# Altium PCB PCB1.PcbDoc
Units mil, origin at the board's own origin, x right, y up, seen from the top; angles counter-clockwise.
Board outline 3150 x 3149.61 mil, 4 copper layers (Top Layer, GND, POWER, Bottom Layer), stack 23.756 mil thick; 108 components, 73 nets, 387 pads, 154 vias.
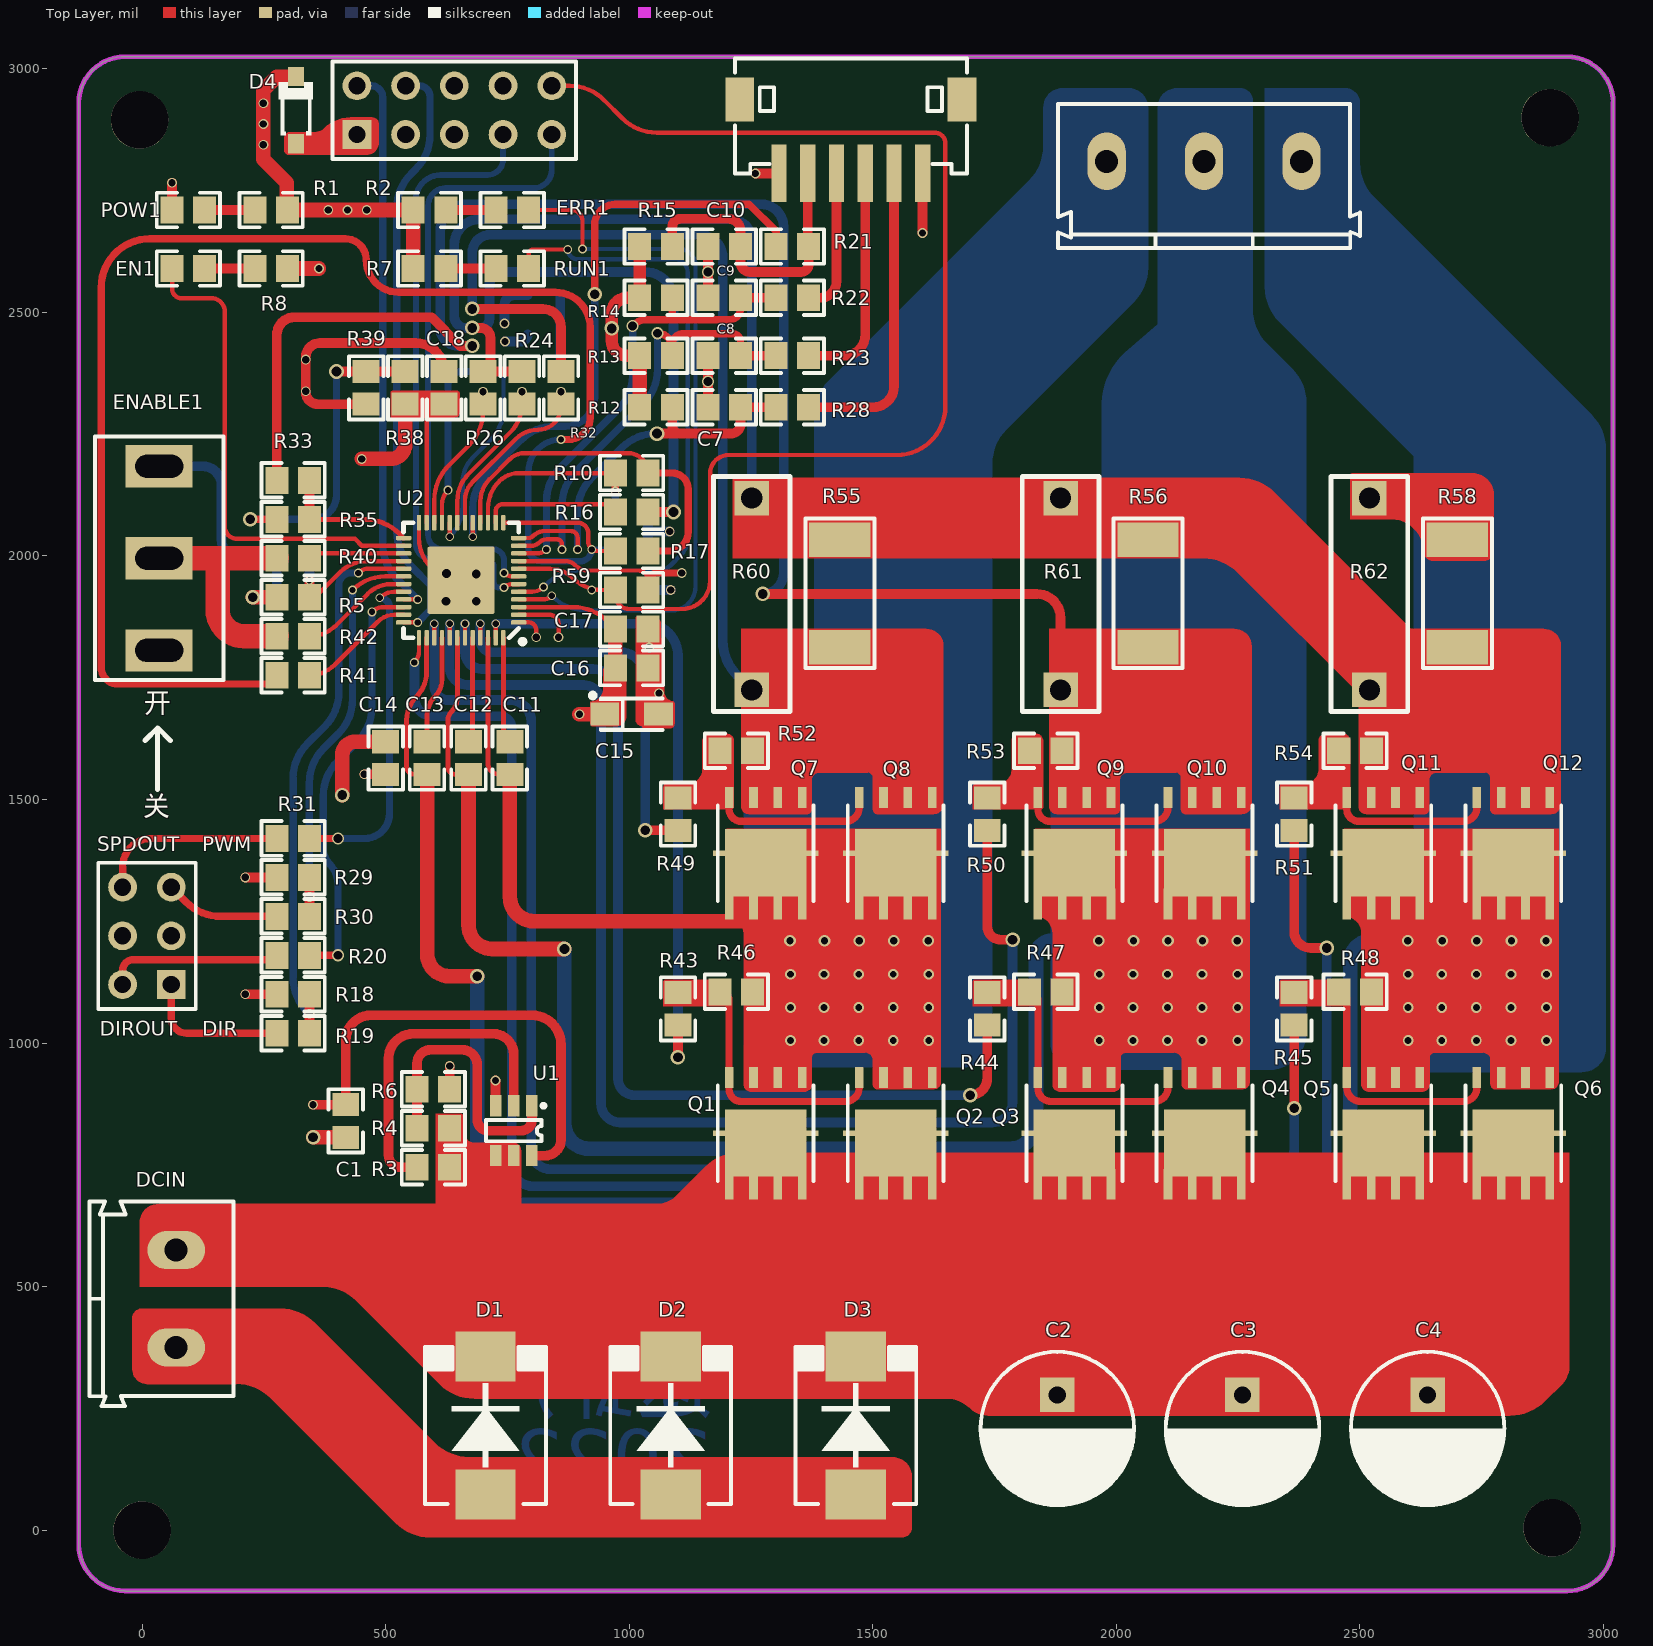
[diagram p0: Top Layer view]
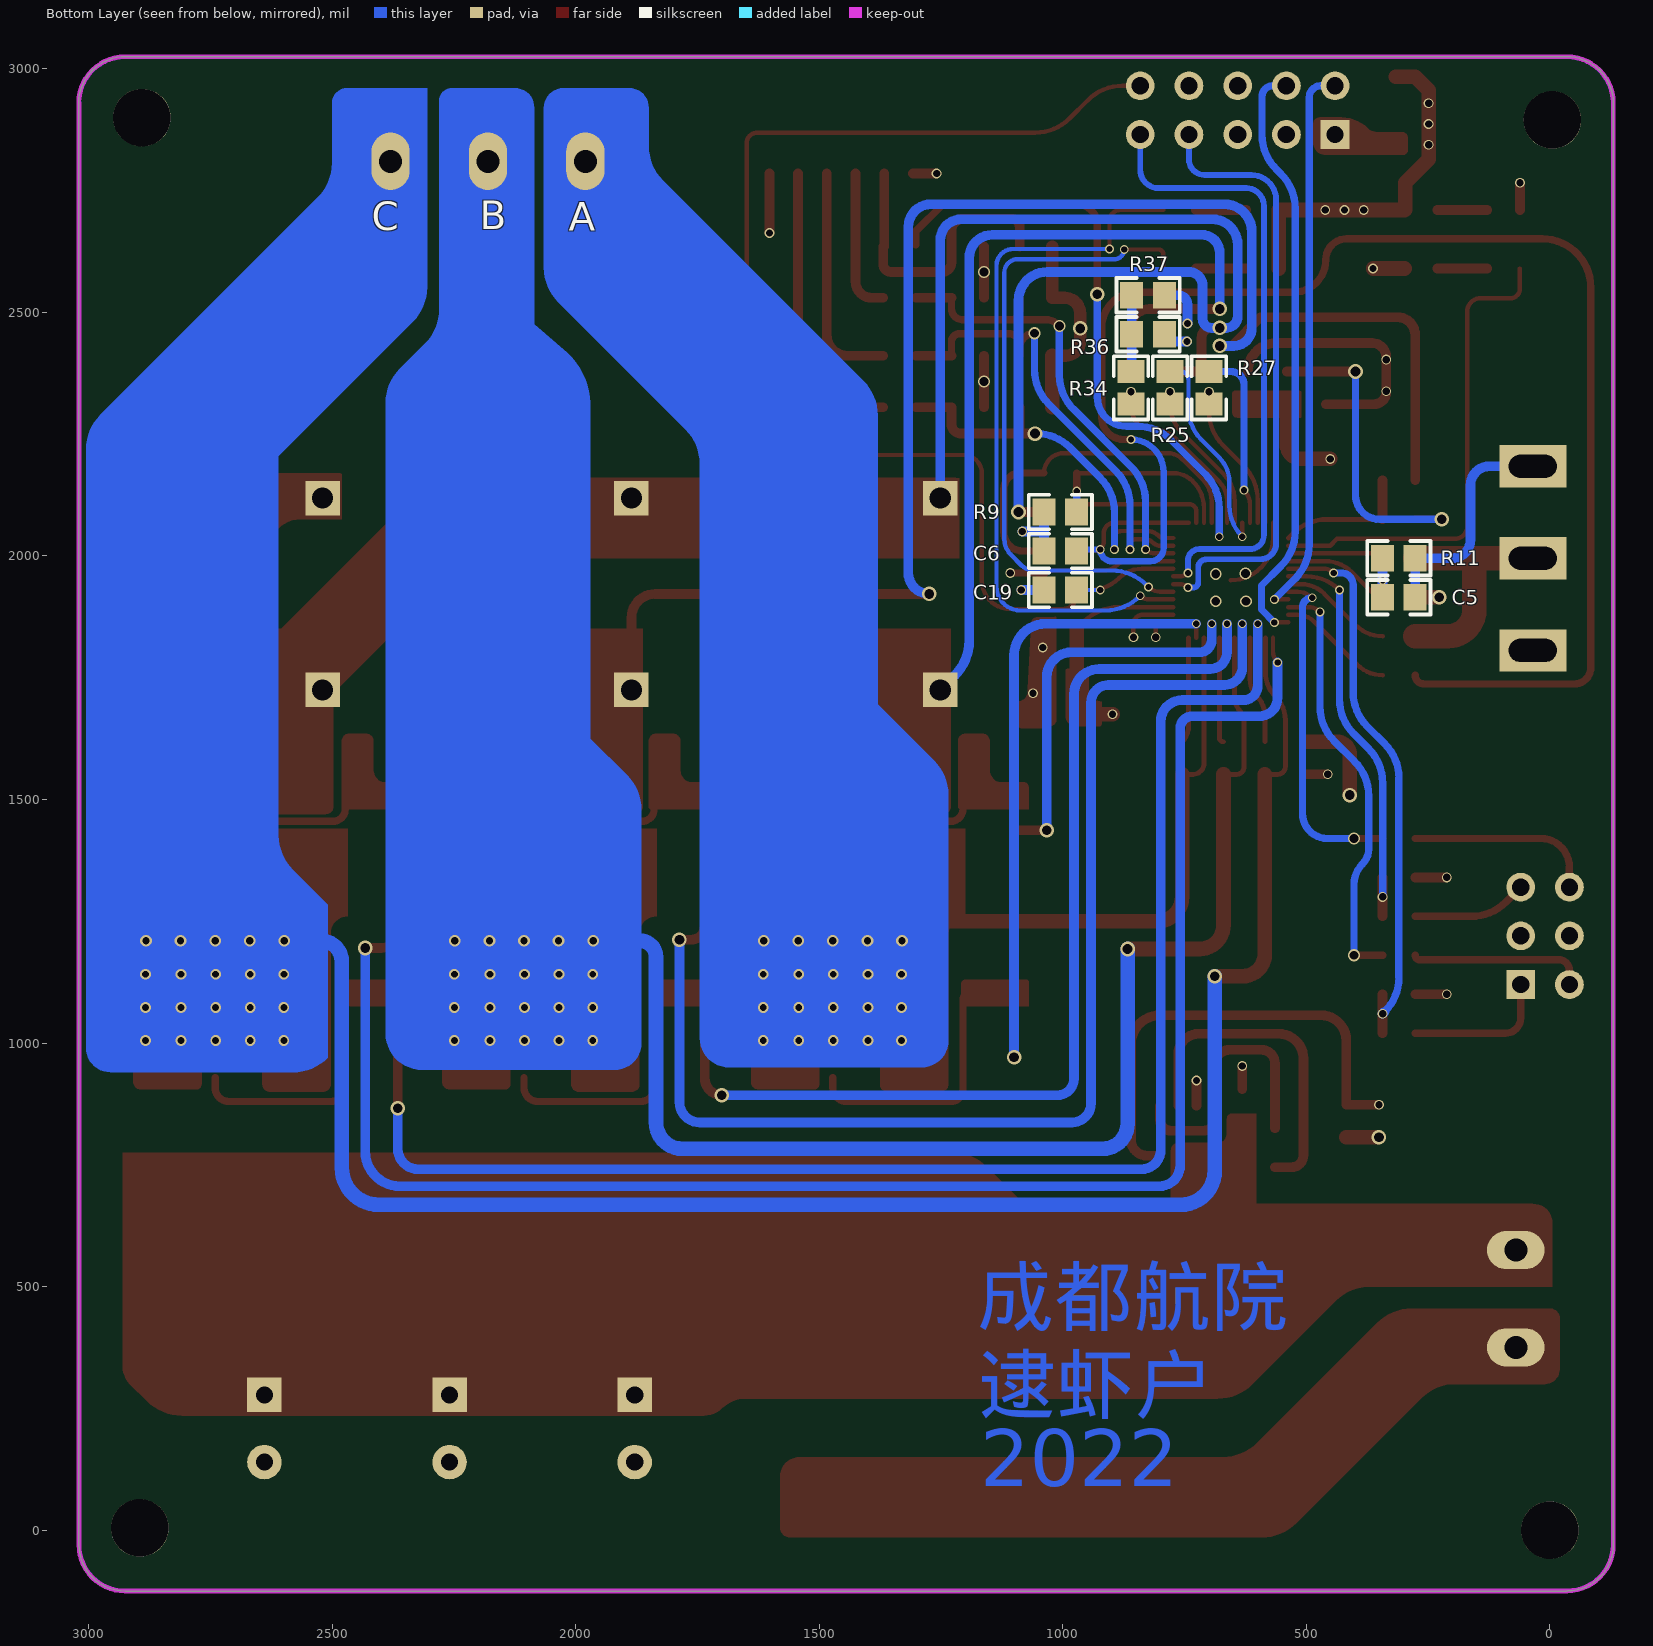
[diagram p1: Bottom Layer view, seen from below]
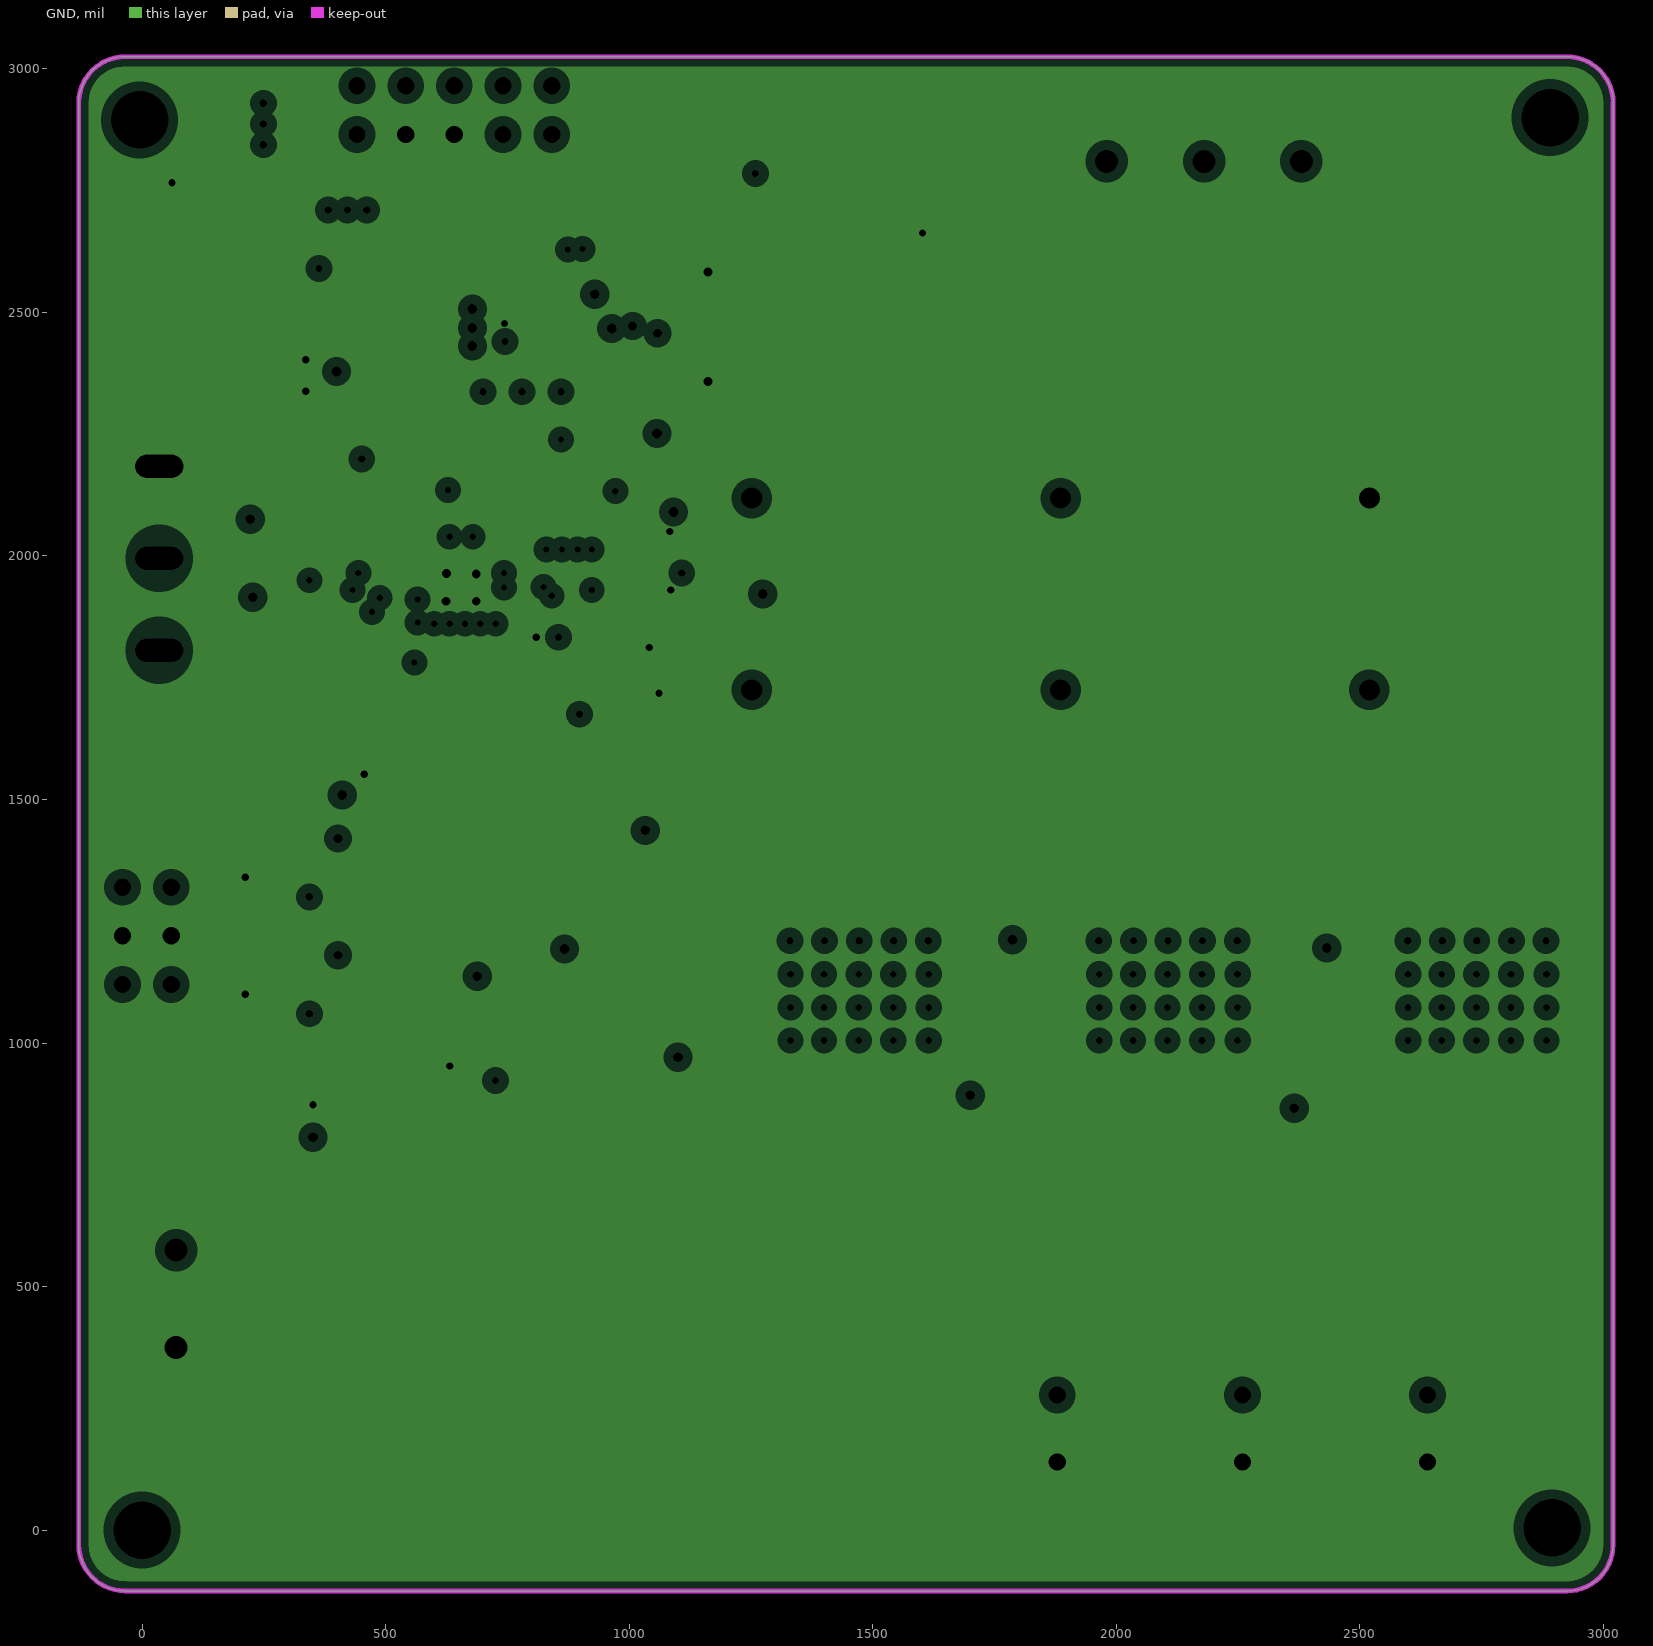
[diagram p2: GND, clearances drawn from the general rule]
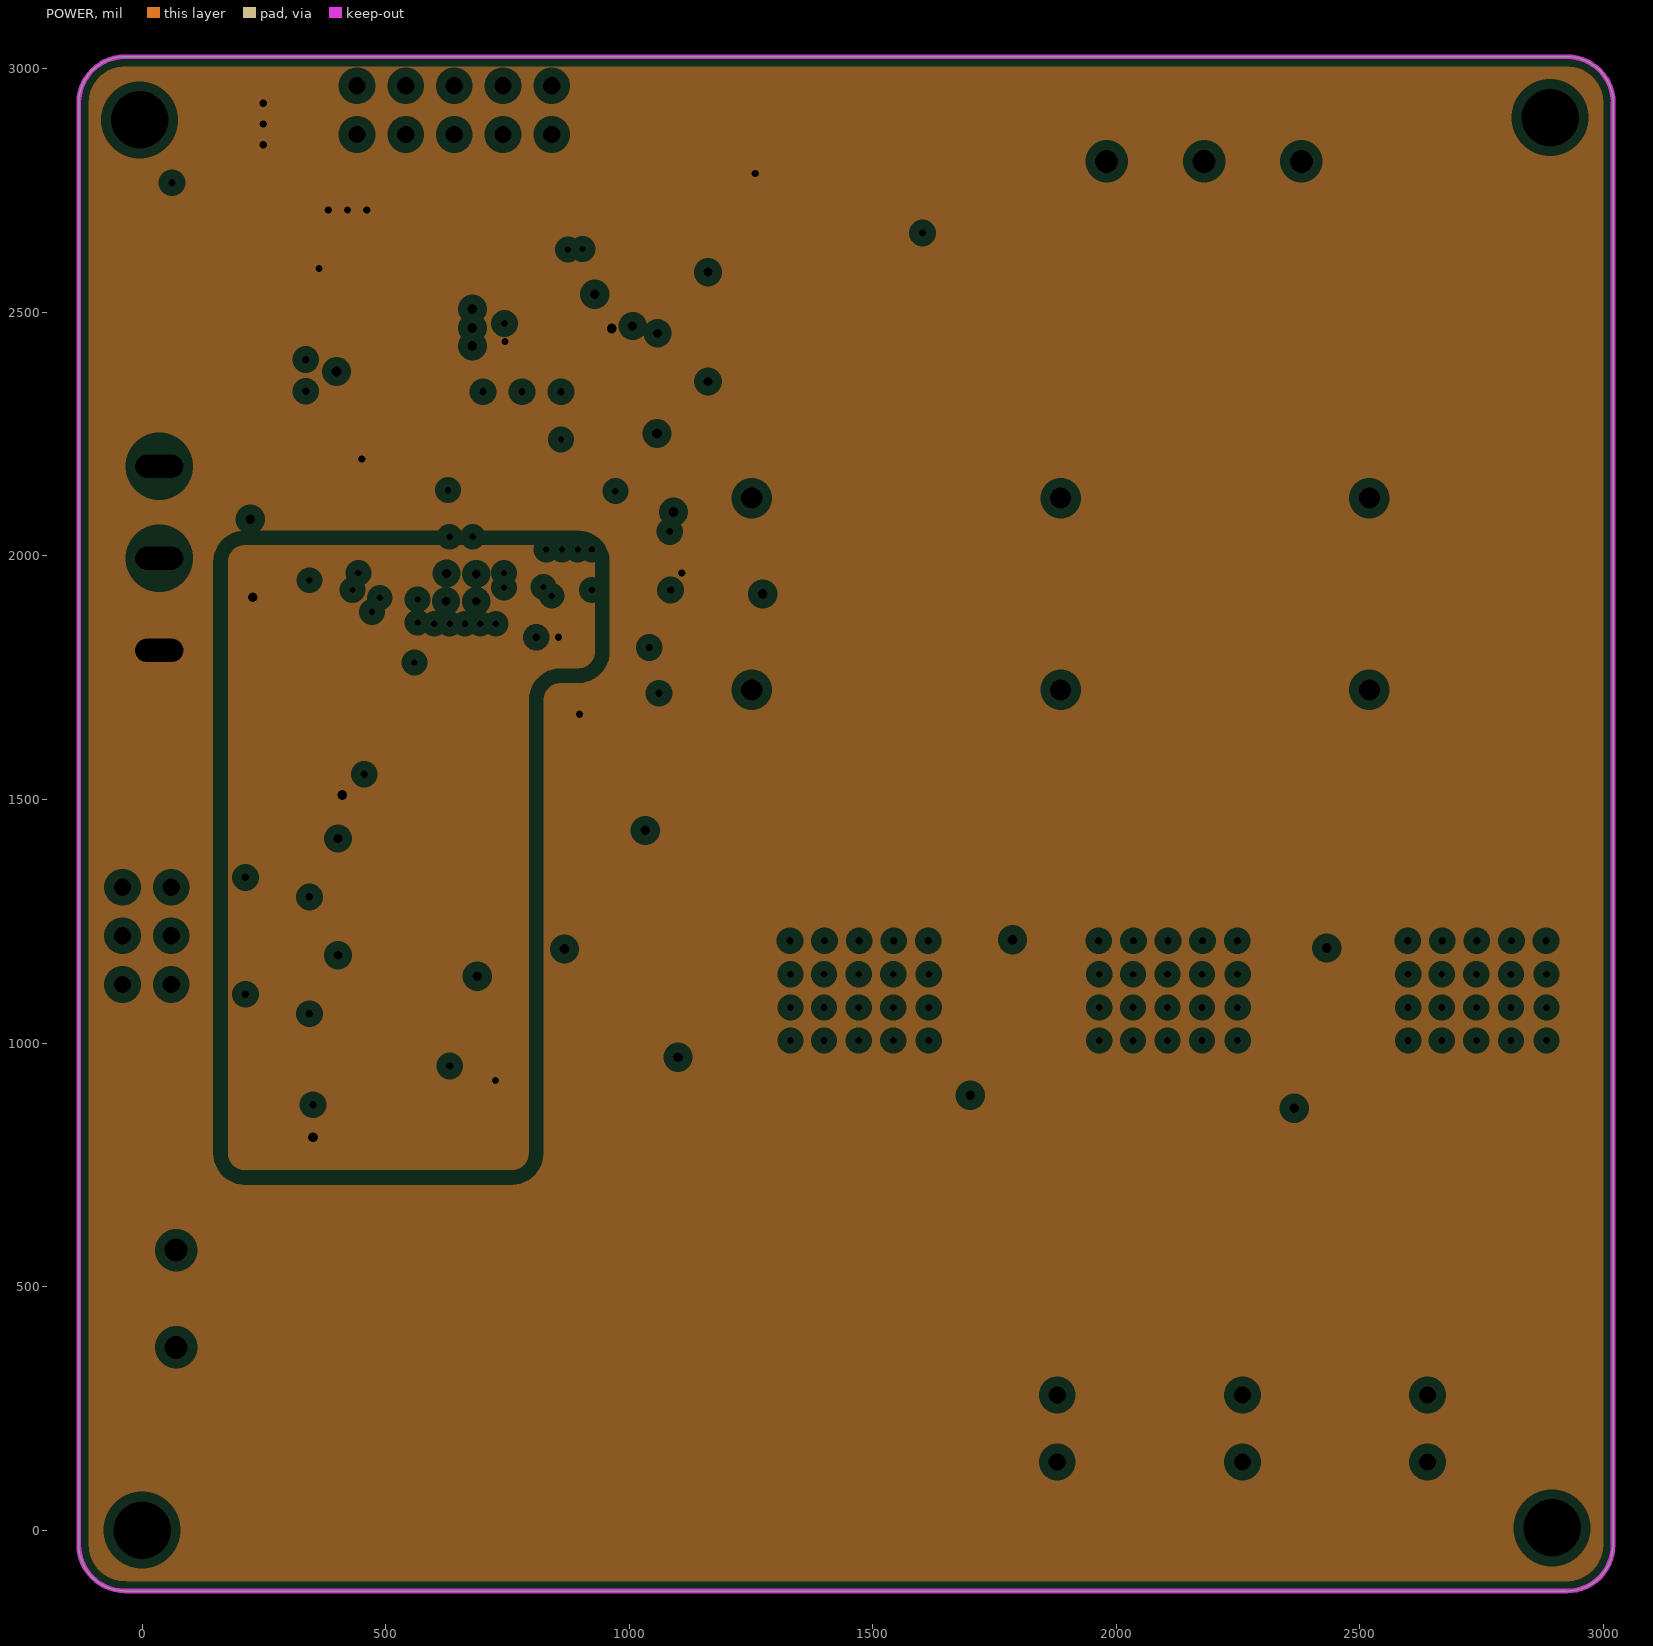
[diagram p3: POWER, clearances drawn from the general rule]
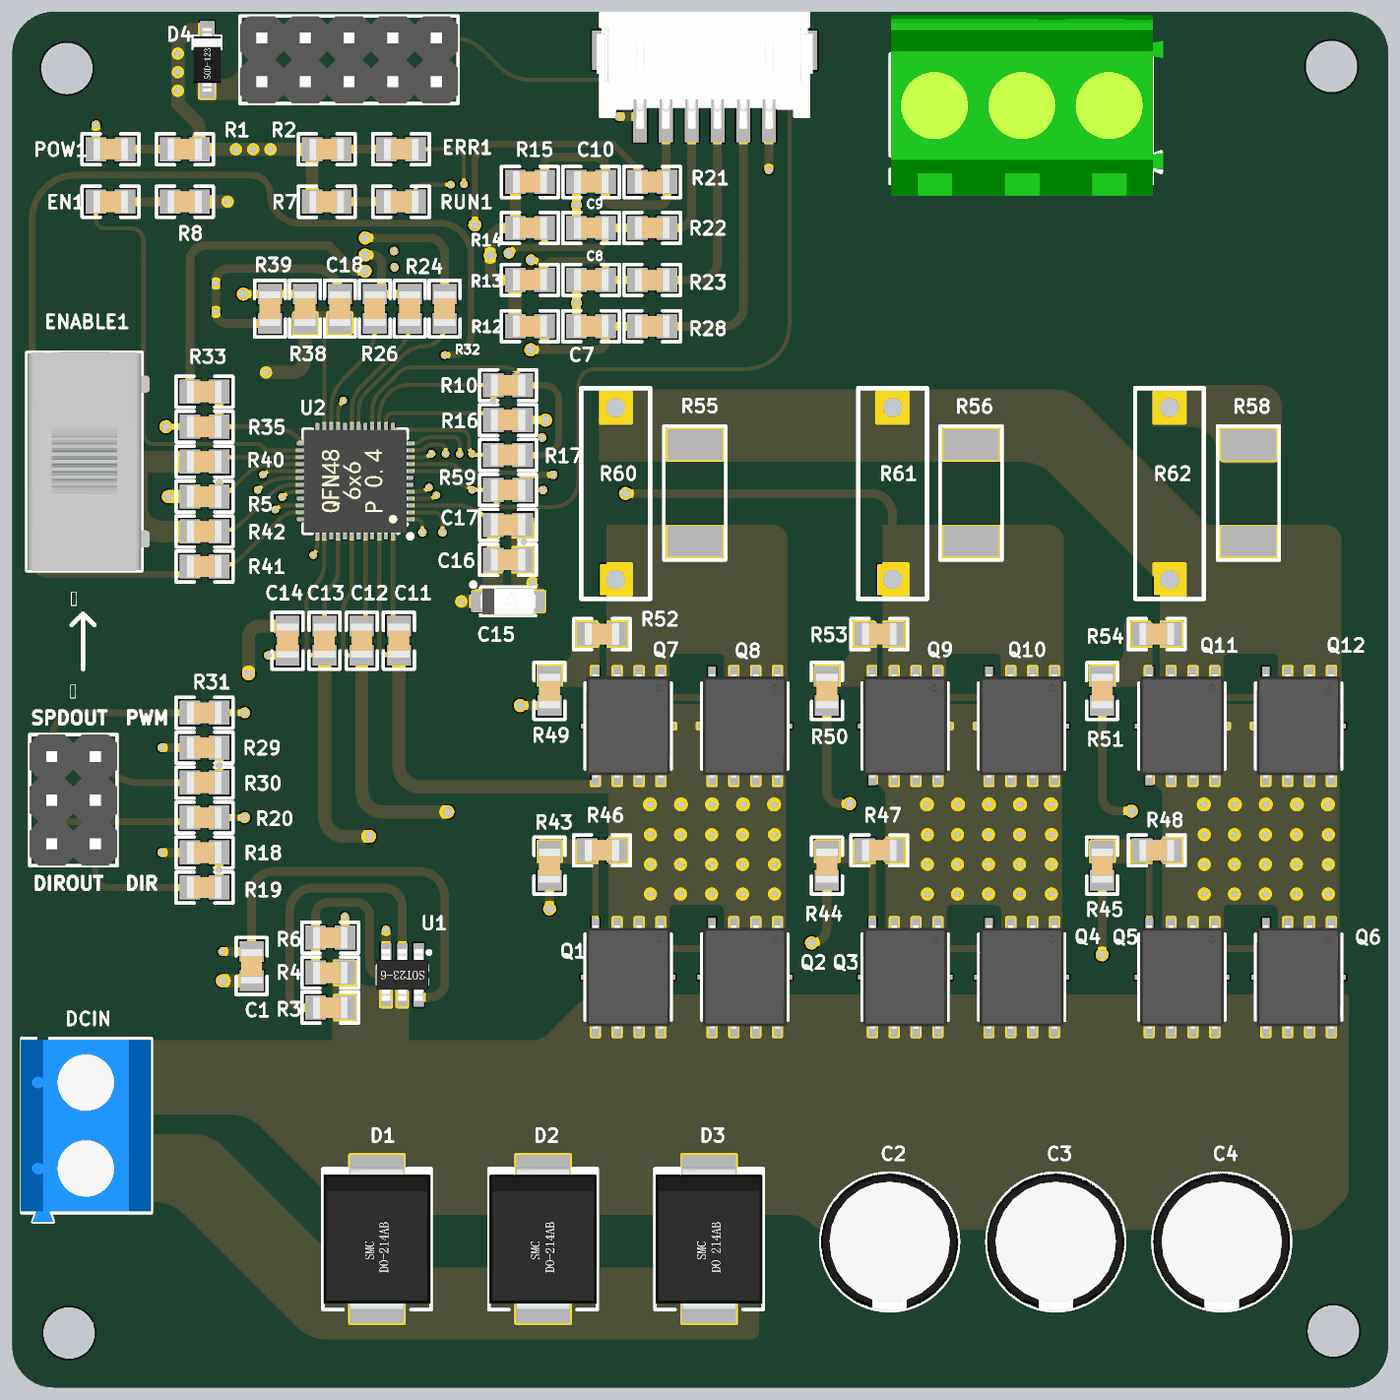
[diagram p4: 3D render of the assembled board from above, using the file's embedded part models]
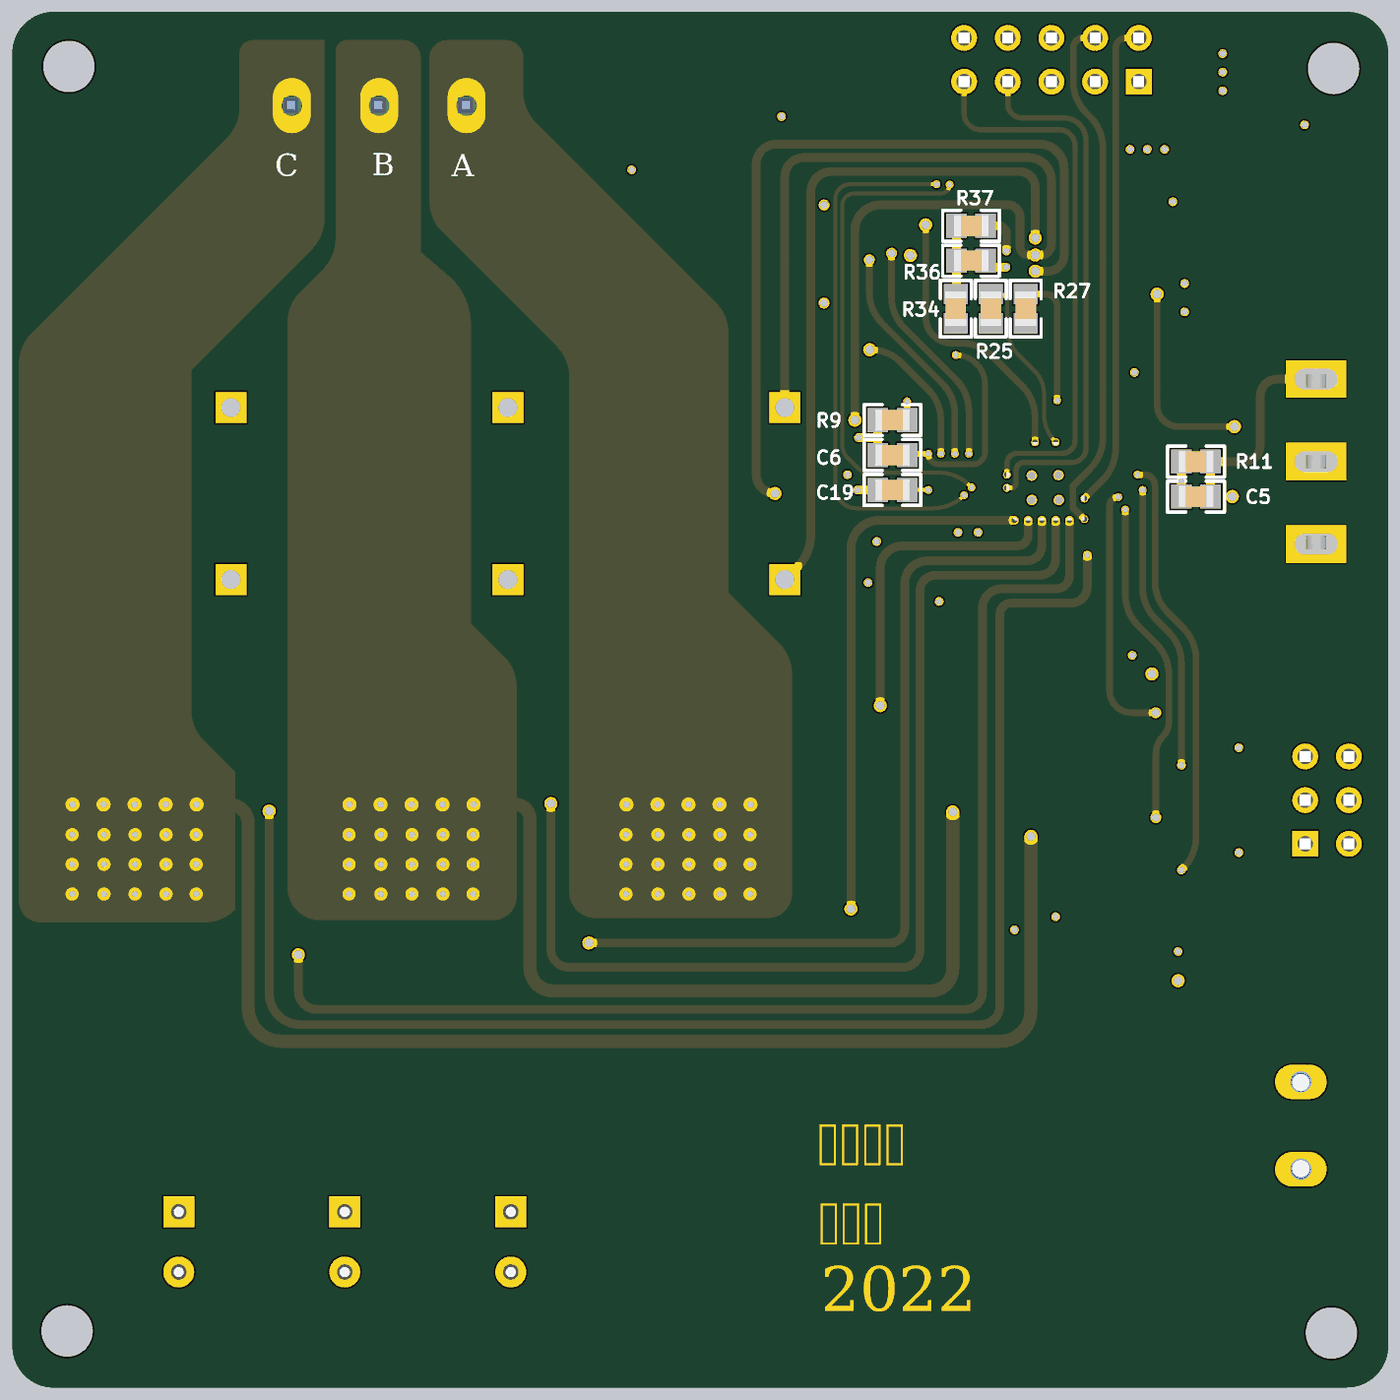
[diagram p5: 3D render of the assembled board from below, using the file's embedded part models]

## Layer stack, top to bottom
Top Solder: solder mask 0.4, Solder Resist, Dk 3.5
Top Layer: signal copper 1.4
Dielectric 2: prepreg 2.8, PP-006, Dk 4.1
GND: plane copper 1.3779, net GND
Dielectric 1: dielectric 12.6, FR-4, Dk 4.8
POWER: plane copper 1.3779, net VCC5V
Dielectric 3: prepreg 2.8, PP-006, Dk 4.1
Bottom Layer: signal copper 1.4
Bottom Solder: solder mask 0.4, Solder Resist, Dk 3.5

## Board outline
-130,-30 -130,2930 cw(c-35.39,2930) -35.39,3024.61 2925.39,3024.61 cw(c2925.39,2930) 3020,2930 3019.61,2930.39 3019.61,-30.39 cw(c2925,-30.39) 2925,-125 -35,-125 -35.39,-124.61 cw(c-35.39,-30)

## Design rules (kind name [scope] priority, off if disabled: settings)
Clearance [All] p1: gap=6 ignorepadtopadclearanceinfootprint=FALSE
PlaneClearance [All] p1: clearance=20
PlaneConnect [All] p1: planeconnectstyle=Relief reliefexpansion=20 reliefentries=4 reliefconductorwidth=20 reliefairgap=10
PolygonConnect [All] p1: connectstyle=Relief reliefconductorwidth=10 reliefentries=4 polygonreliefangle="90 Angle" airgapwidth=10
RoutingVias [All] p1: holewidth=15 width=24 viastyle="Through Hole" minholewidth=11 minwidth=18 maxholewidth=28 maxwidth=50
SolderMaskExpansion [All] p1: expansion=4
Width [All] p1: maxlimit=80 minlimit=7 preferedwidth=20 minimp=50.000000 maximp=50.000000 favimp=50.000000
28 further rules are at their usual default settings.

## Components (designator, comment, footprint, x,y, rotation, side; value= is the part's Value field where it differs from the comment)
C1 "10uF ±10% 25V" CAPC2012[0805]S-N 418,840 r90 top value=10uF
C2 "470uF 25V" CAPPR3.5-8X12 1878.76,208.58 r270 top value=470uF
C3 "470uF 25V" CAPPR3.5-8X12 2258.85,208.58 r270 top value=470uF
C4 "470uF 25V" CAPPR3.5-8X12 2638.95,208.58 r270 top value=470uF
C5 "100nF ±10% 50V" CAPC2012[0805]S-N 310,1915 r0 bottom value=100nF
C6 "1uF ±10% 10V" CAPC2012[0805]S-N 1005,2010 r180 bottom value=1uF
C7 "100nF ±10% 50V" CAPC2012[0805]S-N 1195,2305 r0 top value=100nF
C8 "100nF ±10% 50V" CAPC2012[0805]S-N 1195,2411 r0 top value=100nF
C9 "100nF ±10% 50V" CAPC2012[0805]S-N 1195,2530 r0 top value=100nF
C10 "100nF ±10% 50V" CAPC2012[0805]S-N 1195,2635 r0 top value=100nF
C11 "10uF ±10% 25V" CAPC2012[0805]S-N 755,1585 r270 top value=10uF
C12 "10uF ±10% 25V" CAPC2012[0805]S-N 670,1585 r270 top value=10uF
C13 "10uF ±10% 25V" CAPC2012[0805]S-N 585,1585 r270 top value=10uF
C14 "100nF ±10% 50V" CAPC2012[0805]S-N 500,1585 r90 top value=100nF
C15 "10uF 16V" CAPT3216 1005,1675 r0 top value=10uF
C16 "100nF ±10% 50V" CAPC2012[0805]S-N 1005,1770 r180 top value=100nF
C17 "100nF ±10% 50V" CAPC2012[0805]S-N 1005,1850 r180 top value=100nF
C18 "100nF ±10% 50V" CAPC2012[0805]S-N 620,2345 r270 top value=100nF
C19 "100nF ±10% 50V" CAPC2012[0805]S-N 1005,1930 r180 bottom value=100nF
D1 "SMDJ20CA" SMC[DO-214AB] 705,215 r90 top
D2 "SMDJ20CA" SMC[DO-214AB] 1085.1,215 r90 top
D3 "SMDJ20CA" SMC[DO-214AB] 1465.2,215 r90 top
D4 "1N5819" SOD-123-L 316,2915 r90 top
DCIN "KF/WJ/DG 30x connecter" "KF/WJ/DG 301-2p-5.0mm" 70,475 r90 top
EN1 "蓝色贴片LED" CAPC2012[0805]S-N 95,2590 r180 top
ENABLE1 "SW-SPDT" SS12D10 35,1995 r270 top
ERR1 "黄色贴片LED" CAPC2012[0805]S-N 760,2710 r0 top
Hall "Header 6" ZH1.5-WF-6P 1455,2785 r180 top
MOTOR "KF/WJ/DG 30x connecter" "KF/WJ/DG 301-3p-5.0mm" 2180,2810 r180 top
POW1 "红色贴片LED" CAPC2012[0805]S-N 95,2710 r180 top
Q1 "TPH1R403NL" DFN5x6 1280,814.69 r180 top
Q2 "TPH1R403NL" DFN5x6 1547,814.69 r180 top
Q3 "TPH1R403NL" DFN5x6 1914,814.69 r180 top
Q4 "TPH1R403NL" DFN5x6 2181,814.69 r180 top
Q5 "TPH1R403NL" DFN5x6 2548,814.69 r180 top
Q6 "TPH1R403NL" DFN5x6 2815,814.69 r180 top
Q7 "TPH1R403NL" DFN5x6 1280,1389.69 r180 top
Q8 "TPH1R403NL" DFN5x6 1547,1389.69 r180 top
Q9 "TPH1R403NL" DFN5x6 1914,1389.69 r180 top
Q10 "TPH1R403NL" DFN5x6 2181,1389.69 r180 top
Q11 "TPH1R403NL" DFN5x6 2548,1389.69 r180 top
Q12 "TPH1R403NL" DFN5x6 2815,1389.69 r180 top
R1 "20K ±1%" CAPC2012[0805]S-N 265,2710 r180 top value=20K
R2 "10K ±1%" CAPC2012[0805]S-N 590,2710 r0 top value=10K
R3 "1M ±1%" CAPC2012[0805]S-N 598,745 r0 top value=1M
R4 "20K ±1%" CAPC2012[0805]S-N 598,825 r0 top value=20K
R5 "30K ±1%" CAPC2012[0805]S-N 310,1915 r0 top value=30K
R6 "2K ±1%" CAPC2012[0805]S-N 598,905 r0 top value=2K
R7 "10K ±1%" CAPC2012[0805]S-N 590,2590 r0 top value=10K
R8 "10K ±1%" CAPC2012[0805]S-N 265,2590 r180 top value=10K
R9 "1K ±1%" CAPC2012[0805]S-N 1005,2090 r180 bottom value=1K
R10 "47K ±1%" CAPC2012[0805]S-N 1005,2170 r0 top value=47K
R11 "10K ±1%" CAPC2012[0805]S-N 310,1995 r0 bottom value=10K
R12 "4.7K ±1%" CAPC2012[0805]S-N 1055,2305 r180 top value=4.7K
R13 "4.7K ±1%" CAPC2012[0805]S-N 1055,2411 r180 top value=4.7K
R14 "4.7K ±1%" CAPC2012[0805]S-N 1055,2530 r180 top value=4.7K
R15 "10K ±1%" CAPC2012[0805]S-N 1055,2635 r180 top value=10K
R16 "1K ±1%" CAPC2012[0805]S-N 1005,2090 r180 top value=1K
R17 "10K ±1%" CAPC2012[0805]S-N 1005,2010 r180 top value=10K
R18 "10K ±1%" CAPC2012[0805]S-N 310,1100 r0 top value=10K
R19 "100R ±1%" CAPC2012[0805]S-N 310,1020 r0 top value=100R
R20 "100R ±1%" CAPC2012[0805]S-N 310,1180 r0 top value=100R
R21 "100R ±1%" CAPC2012[0805]S-N 1335,2635 r0 top value=100R
R22 "100R ±1%" CAPC2012[0805]S-N 1335,2530 r0 top value=100R
R23 "100R ±1%" CAPC2012[0805]S-N 1335,2411 r0 top value=100R
R24 "1K ±1%" CAPC2012[0805]S-N 780,2345 r270 top value=1K
R25 "100K ±1%" CAPC2012[0805]S-N 780,2345 r90 bottom value=100K
R26 "1K ±1%" CAPC2012[0805]S-N 700,2345 r270 top value=1K
R27 "100K ±1%" CAPC2012[0805]S-N 700,2345 r90 bottom value=100K
R28 "100R ±1%" CAPC2012[0805]S-N 1335,2305 r0 top value=100R
R29 "10K ±1%" CAPC2012[0805]S-N 310,1340 r180 top value=10K
R30 "100R ±1%" CAPC2012[0805]S-N 310,1260 r180 top value=100R
R31 "100R ±1%" CAPC2012[0805]S-N 310,1420 r0 top value=100R
R32 "1K ±1%" CAPC2012[0805]S-N 860,2345 r270 top value=1K
R33 "1K ±1%" CAPC2012[0805]S-N 310,2155 r0 top value=1K
R34 "100K ±1%" CAPC2012[0805]S-N 860,2345 r270 bottom value=100K
R35 "100K ±1%" CAPC2012[0805]S-N 310,2075 r0 top value=100K
R36 "10K ±1%" CAPC2012[0805]S-N 825,2455 r0 bottom value=10K
R37 "10K ±1%" CAPC2012[0805]S-N 825,2535 r180 bottom value=10K
R38 "10K ±1%" CAPC2012[0805]S-N 540,2345 r90 top value=10K
R39 "10K ±1%" CAPC2012[0805]S-N 460,2345 r270 top value=10K
R40 "1K ±1%" CAPC2012[0805]S-N 310,1995 r180 top value=1K
R41 "100R ±1%" CAPC2012[0805]S-N 310,1755 r0 top value=100R
R42 "1K ±1%" CAPC2012[0805]S-N 310,1835 r180 top value=1K
R43 "4R7 ±1%" CAPC2012[0805]S-N 1100,1070 r90 top value=4R7
R44 "4R7 ±1%" CAPC2012[0805]S-N 1735,1070 r90 top value=4R7
R45 "4R7 ±1%" CAPC2012[0805]S-N 2365,1070 r90 top value=4R7
R46 "10K ±1%" CAPC2012[0805]S-N 1220,1105 r180 top value=10K
R47 "10K ±1%" CAPC2012[0805]S-N 1855,1105 r180 top value=10K
R48 "10K ±1%" CAPC2012[0805]S-N 2490,1105 r180 top value=10K
R49 "4R7 ±1%" CAPC2012[0805]S-N 1100,1470 r90 top value=4R7
R50 "4R7 ±1%" CAPC2012[0805]S-N 1735,1470 r90 top value=4R7
R51 "4R7 ±1%" CAPC2012[0805]S-N 2365,1470 r90 top value=4R7
R52 "10K ±1%" CAPC2012[0805]S-N 1220,1600 r180 top value=10K
R53 "10K ±1%" CAPC2012[0805]S-N 1855,1600 r180 top value=10K
R54 "10K ±1%" CAPC2012[0805]S-N 2490,1600 r180 top value=10K
R55 "2mR ±1%" RESC6332[2512]S 1432.54,1923.11 r270 top value=2mR
R56 "2mR ±1%" RESC6332[2512]S 2065,1923.11 r270 top value=2mR
R58 "2mR ±1%" RESC6332[2512]S 2700,1923.11 r270 top value=2mR
R59 "10K ±1%" CAPC2012[0805]S-N 1005,1930 r0 top value=10K
R60 "2mR ±1%" res2m 1251.47,2118.7 r270 top value=2mR
R61 "2mR ±1%" res2m 1885.47,2118.7 r270 top value=2mR
R62 "2mR ±1%" res2m 2519.47,2118.7 r270 top value=2mR
RUN1 "翠绿贴片LED" CAPC2012[0805]S-N 760,2590 r0 top
SIGIN "Header 3X2" HDR2X3 60,1120 r90 top
SW "Header 5X2" HDR2X5 441,2865 r0 top
U1 "ETA7014" SOT-23-6 763,820 r270 top
U2 "MM32SPIN360C" QFN48-6x6 655,1950 r180 top

## Footprints (in the part's own frame and the unit in brackets; to place one, negate y for a bottom-side part, rotate by r counter-clockwise, add the part's x,y. Pads: shape width x height; smd on the part's side, far side on the other; paste and mask are expansions set on the pad)
CAPC2012[0805]S-N [mm]
  rect 1.2x1.4 smd: 1(-0.85,0) 2(0.85,0)
  silkscreen extent -1.65,-0.9 1.65,0.9, body extent -1,-0.63 1,0.62, height 1.25
CAPPR3.5-8X12 [mm]
  rect 1.8x1.8 hole 0.9: 1(-1.75,0)
  round 1.8 hole 0.9: 2(1.75,0)
  silkscreen extent -4,-4.01 4,4, body extent -4,-4 4,4, height 12
CAPT3216 [mm]
  rect 1.5x1.2 smd: 1(-1.4,0) 2(1.4,0)
  silkscreen extent -2.15,-0.9 1.6,1.1, body extent -1.6,-0.8 1.6,0.8, height 1.6
DFN5x6 [mm]
  rect 0.45x1.6 smd: 1(-1.905,2.65) 1(-0.635,2.65) 1(0.635,2.65) 1(1.905,2.65)
  rect 5.5x0.3 smd: 1(0,0)
  rect 4.25x3.5 smd: 1(0,0.5)
  rect 0.45x1.1 smd: 2(1.905,-2.9) 3(-1.905,-2.9) 3(-0.635,-2.9) 3(0.635,-2.9)
  silkscreen extent -2.5,-2.5 2.5,2.5, body extent -2.45,-3 2.45,3, height 1
HDR2X3 [mm]
  rect 1.5x1.5 hole 0.9: 1(0,0)
  round 1.5 hole 0.9: 2(0,2.54) 3(2.54,0) 4(2.54,2.54) 5(5.08,0) 6(5.08,2.54)
  silkscreen extent -1.27,-1.27 6.35,3.81, body extent -1.27,-1.27 6.35,3.81, height 8.54
HDR2X5 [mm]
  rect 1.5x1.5 hole 0.9: 1(0,0)
  round 1.5 hole 0.9: 2(0,2.54) 3(2.54,0) 4(2.54,2.54) 5(5.08,0) 6(5.08,2.54) 7(7.62,0) 8(7.62,2.54) 9(10.16,0) 10(10.16,2.54)
  silkscreen extent -1.27,-1.27 11.43,3.81, body extent -1.27,-1.27 11.43,3.81, height 8.54
"KF/WJ/DG 301-2p-5.0mm" [mm]
  oval 2x3 hole 1.2: 1(2.54,0) 2(-2.54,0)
  silkscreen extent -5.6,-3 5.08,4.52, body extent -5.6,-3 5,4.6, height 10
"KF/WJ/DG 301-3p-5.0mm" [mm]
  oval 2x3 hole 1.2: 1(5.08,0) 2(0,0) 3(-5.08,0)
  silkscreen extent -8.14,-3 7.62,4.52, body extent -8.27,-5.26 7.57,5.24, height 14.35
QFN48-6x6 [mm]
  rrect5% 3.5x3.5 smd paste+0 mask+0.05: 0(0,0)
  rrect50% 0.8x0.23 smd paste+0 mask+0.05: 1(-3,2.2) 2(-3,1.8) 3(-3,1.4) 4(-3,1) 5(-3,0.6) 6(-3,0.2) 7(-3,-0.2) 8(-3,-0.6) 9(-3,-1) 10(-3,-1.4) 11(-3,-1.8) 12(-3,-2.2) 25(3,-2.2) 26(3,-1.8) 27(3,-1.4) 28(3,-1) 29(3,-0.6) 30(3,-0.2) 31(3,0.2) 32(3,0.6) 33(3,1) 34(3,1.4) 35(3,1.8) 36(3,2.2)
  rrect50% 0.23x0.8 smd paste+0 mask+0.05: 13(-2.2,-3) 14(-1.8,-3) 15(-1.4,-3) 16(-1,-3) 17(-0.6,-3) 18(-0.2,-3) 19(0.2,-3) 20(0.6,-3) 21(1,-3) 22(1.4,-3) 23(1.8,-3) 24(2.2,-3) 37(2.2,3) 38(1.8,3) 39(1.4,3) 40(1,3) 41(0.6,3) 42(0.2,3) 43(-0.2,3) 44(-0.6,3) 45(-1,3) 46(-1.4,3) 47(-1.8,3) 48(-2.2,3)
  silkscreen extent -3.33,-3 3,3.32, body extent -3.02,-3.02 3.02,3.02, height 0.65
res2m [mm]
  rect 1.8x1.8 hole 1.1: 1(0,0) 2(10,0)
  silkscreen extent -1.13,-2 11.13,2
RESC6332[2512]S [mm]
  rect 1.8x3.2 smd: 1(-2.8,0) 2(2.8,0)
  silkscreen extent -3.9,-1.8 3.9,1.8, body extent -3.22,-1.68 3.22,1.68, height 0.71
SMC[DO-214AB] [mm]
  rect 2.6x3.15 smd: A(-3.6,0) K(3.6,0)
  silkscreen extent -4.1,-3.15 4.1,3.15, body extent -4.17,-3.11 4.18,3.11, height 2.3
SOD-123-L [mm]
  rect 1x0.85 smd: A(-1.75,0) K(1.75,0)
  silkscreen extent -1.32,-0.9 1.48,0.9, body extent -1.85,-0.8 1.85,0.8, height 1.2
SOT-23-6 [mm]
  rect 1.1x0.6 smd: 1(-1.3,0.95) 2(-1.3,0) 3(-1.3,-0.95) 4(1.3,-0.95) 5(1.3,0) 6(1.3,0.95)
  silkscreen extent -1.37,-1.45 0.55,1.63, body extent -1.5,-1.5 1.5,1.5, height 1.55
SS12D10 [mm]
  rect 2.2x3.5 hole 1.2 slot 2.5 at 90 deg mask+0.07: 1(-4.8,0) 2(0,0) 3(4.8,0)
  silkscreen extent -6.35,-3.35 6.35,3.35, body extent -6.4,-3.3 6.35,3.8, height 12.5
ZH1.5-WF-6P [mm]
  rect 1.5x2.3 smd: 0(-5.8,-3.85) 0(5.8,-3.85)
  rect 0.8x3 smd: 1(-3.75,0) 2(-2.25,0) 3(-0.75,0) 4(0.75,0) 5(2.25,0) 6(3.75,0)
  silkscreen extent -6.05,-6 6.05,0, body extent -6.29,-6 6.29,0.71, height 3.9

## Part data
C1 C11 C12 C13: library part Cap-Chip, "贴片电容", Tolerance=±10%, Voltage=25V, Published=2020-12-18, Revision=V1.1
C2 C3 C4: library part Cap-Elect, "Polarized Capacitor (Radial)", Voltage=25V, Price(RMB)=0.000, Published=8-Jun-2000, Publisher="Altium Limited", Revision="July-2002: Re-released for DXP Platform."
C5 C7 C8 C9 C10 C14 C16 C17 C18 C19: library part Cap-Chip_1, "贴片电容", Tolerance=±10%, Voltage=50V, Published=2020-12-18, Revision=V1.1
C6: library part Cap-Chip_2, "贴片电容", Tolerance=±10%, Voltage=10V, Published=2020-12-18, Revision=V1.1
C15: library part Cap-Tan, "Tantalum Capacitor", Voltage=16V, Price(RMB)=0.000, Published=8-Jun-2000, Publisher="Altium Limited", Revision="July-2002: Re-released for DXP Platform."
D1 D2 D3: library part "Diode TVS Bi-Dir", "TRANSIENT VOLTAGE  SUPPRESSOR DIODE", Imax=500mA, Price(RMB)=0.000, Published=8-Jun-2000, Publisher="Altium Limited"
D4: library part Diode, "普通二极管 Diode", Imax=500mA, Price(RMB)=0.000, Published=8-Jun-2000, Publisher="Altium Limited", Revision="July-2002: Re-released for DXP Platform."
DCIN: library part "KF/WJ/DG 30x", "接线端子 2Pin"
EN1: library part "LED Chip Blue", Color=Blue, Price(RMB)=0.00, Published=8-Jun-2000, Publisher="Altium Limited", Revision="July-2002: Re-released for DXP Platform."
ENABLE1: "单刀双掷开关 3脚船型、钮子、拨动开关 SPDT Subminiature Toggle Switch"
ERR1: library part "LED Chip Yellow", Price(RMB)=0.00, Published=8-Jun-2000, Publisher="Altium Limited", Revision="July-2002: Re-released for DXP Platform."
Hall: "Header, 6-Pin", LatestRevisionDate=17-Jul-2002, LatestRevisionNote="Re-released for DXP Platform.", Price(RMB)=0.00, Publisher="Altium Limited"
MOTOR: library part "KF/WJ/DG 30x-3P", "接线端子 3Pin"
POW1: library part "LED Chip Red", Price(RMB)=0.00, Published=8-Jun-2000, Publisher="Altium Limited", Revision="July-2002: Re-released for DXP Platform."
Q1 Q2 Q3 Q4 Q5 Q6 Q7 Q8 Q9 Q10 Q11 Q12: "东芝 N沟 MOS"
R1 R4: library part Res-Chip_2, "贴片电阻", Tolerance=±1%, Published=8-Jun-2000, Revision="July-2002: Re-released for DXP Platform."
R2 R7 R8 R11 R17 R18 R29 R36 R37 R38 R39 R46 R47 R48 R52 R53 R54 R59: library part Res-Chip, "贴片电阻", Tolerance=±1%, Published=8-Jun-2000, Revision="July-2002: Re-released for DXP Platform."
R3: library part Res-Chip_6, "贴片电阻", Tolerance=±1%, Published=8-Jun-2000, Revision="July-2002: Re-released for DXP Platform."
R5: library part Res-Chip_1, "贴片电阻", Tolerance=±1%, Published=8-Jun-2000, Revision="July-2002: Re-released for DXP Platform."
R6: library part Res-Chip_9, "贴片电阻", Tolerance=±1%, Published=8-Jun-2000, Revision="July-2002: Re-released for DXP Platform."
R9 R16 R24 R26 R32 R33 R40 R42: library part Res-Chip_3, "贴片电阻", Tolerance=±1%, Published=8-Jun-2000, Revision="July-2002: Re-released for DXP Platform."
R10: library part Res-Chip_4, "贴片电阻", Tolerance=±1%, Published=8-Jun-2000, Revision="July-2002: Re-released for DXP Platform."
R12 R13 R14 R15: library part Res-Chip_7, "贴片电阻", Tolerance=±1%, Published=8-Jun-2000, Revision="July-2002: Re-released for DXP Platform."
R19 R20 R21 R22 R23 R28 R30 R31 R41: library part Res-Chip_8, "贴片电阻", Tolerance=±1%, Published=8-Jun-2000, Revision="July-2002: Re-released for DXP Platform."
R25 R27 R34 R35: library part Res-Chip_5, "贴片电阻", Tolerance=±1%, Published=8-Jun-2000, Revision="July-2002: Re-released for DXP Platform."
R43 R44 R45 R49 R50 R51: library part Res-Chip_10, "贴片电阻", Tolerance=±1%, Published=8-Jun-2000, Revision="July-2002: Re-released for DXP Platform."
R55 R56 R58 R60 R61 R62: library part Res-Chip_11, "贴片电阻", Tolerance=±1%, Published=8-Jun-2000, Revision="July-2002: Re-released for DXP Platform."
RUN1: library part "LED Chip Green", Price(RMB)=0.00, Published=8-Jun-2000, Publisher="Altium Limited", Revision="July-2002: Re-released for DXP Platform."
SIGIN: "Header, 3-Pin, Dual row", LatestRevisionDate=17-Jul-2002, LatestRevisionNote="Re-released for DXP Platform.", Price(RMB)=0.00, Publisher="Altium Limited"
SW: "Header, 5-Pin, Dual row", LatestRevisionDate=17-Jul-2002, LatestRevisionNote="Re-released for DXP Platform.", Price(RMB)=0.00, Publisher="Altium Limited"
U1: "ETA7014 OVPоƬ"
U2: ComponentLink1Description="Manufacturer Link", ComponentLink1URL=www.st.com/stm32, ComponentLink2Description=Datasheet, ComponentLink2URL=http://www.st.com/stonline/products/literature/ds/13587.pdf, DatasheetVersion="rev6, Mar-2008", PackageDescription="48-Pin Low-Profile Quad Flat Pack, 7 x 7 mm Body, 0.5 mm Pitch (LQFP48)", PackageReference=LQFP48, PackageVersion=Mar-2008, Published=30-May-2008, Publisher="Altium Limited"

## Free pads (board coordinates)
  round 118.11 hole 118.11 unplated: 0(-5,2895) 0(0,0) 0(2890.39,2899.61) 0(2894.61,4.61)

## Via types
v1: diameter 22, hole 14, Top Layer to Bottom Layer, 45 vias
v2: diameter 20, hole 15, Top Layer to Bottom Layer, 34 vias
v3: diameter 18, hole 13, Top Layer to Bottom Layer, 29 vias
v4: diameter 30, hole 20, Top Layer to Bottom Layer, 21 vias
v5: diameter 24, hole 15, Top Layer to Bottom Layer, 15 vias
v6: diameter 25, hole 18, Top Layer to Bottom Layer, 6 vias
v7: diameter 24, hole 18, Top Layer to Bottom Layer, 4 vias

## Nets (pads, with @x,y where several pads share a name; then routed paths per layer and width w, separated by ;. In a path a pad name is that pad's centre, name@x,y a point inside that pad or via, vN(x,y) a via of type N, cw(c..) or ccw(c..) an arc to the next point about the centre after c; other vN are vias at no path point)
A0: C9.2 R14.1 R22.1 U2.10 | length 971
  Top Layer w9: U2.10 810.97,2005.12 ccw(c810.97,2032.03) v3(830,2013)
  Top Layer w15: v6(1007,2472) 1009.39,2474.39 cw(c1035,2448.79) 1035,2485 1105,2485 ; R14.1 1088.46,2501.54 ccw(c1105,2501.54) 1105,2485 ; C9.2 1228.46,2507.17 cw(c1206.3,2507.17) 1206.3,2485 1105,2485
  Top Layer w20: C9.2 R22.1
  Bottom Layer w15: v3(830,2013) 830,2111.58 cw(c930,2111.58) 859.29,2182.29 977.71,2300.71 ccw(c907,2371.42) 1007,2371.42 v6(1007,2472)
A1: C8.2 R13.1 R23.1 U2.11 | length 959.9
  Top Layer w9: U2.11 798.78,2020.87 ccw(c798.78,2045.22) 816,2028 cw(c830.49,2013.51) 830.49,2034 851.76,2034 cw(c851.76,2023.76) 862,2023.76 v3(862,2013)
  Top Layer w15: v6(1058,2457) cw(c1058,2426.54) R13.1@1088.46,2426.54 ; R13.1 R13.1@1088.46,2426.54 ; C8.2 1228.46,2439.46 ccw(c1211.93,2439.46) 1211.93,2456 1110.63,2456 ccw(c1110.63,2433.83) 1088.46,2433.83 R13.1@1088.46,2426.54
  Top Layer w20: C8.2 R23.1
  Bottom Layer w15: v3(862,2013) 862,2103.58 cw(c962,2103.58) 891.29,2174.29 1028.71,2311.71 ccw(c958,2382.42) 1058,2382.42 v6(1058,2457)
A2: C7.2 R12.1 R28.1 U2.12 | length 833.4
  Top Layer w9: U2.12 792.41,2036.61 ccw(c792.41,2051.59) 803,2041 cw(c827.14,2016.86) 827.14,2051 880,2051 cw(c880,2037) 894,2037 v3(894,2013)
  Top Layer w20: v4@1056,2252 ccw(c1057,2252) v4(1057,2251) 1104,2251 ; R12.1 1088.46,2266.54 ccw(c1104,2266.54) 1104,2251 ; R28.1 C7.2 1228.46,2271 cw(c1208.46,2271) 1208.46,2251 1104,2251
  Bottom Layer w15: v3(894,2013) 894,2089.58 cw(c994,2089.58) 923.29,2160.29 985.71,2222.71 cw(c1054.01,2154.41) 1054.01,2251 v4(1057,2251)
A3: C6.2 R17.2 R41.1 U2.13 | length 3346.7
  Top Layer w9: U2.13 893.65,2068.11 cw(c893.65,2045.76) 916,2045.76 916,2028.75 ccw(c934.75,2028.75) 934.75,2010 R17.2
  Top Layer w15: R41.1 cw(c258.54,1755) 258.54,1737 -50,1737 cw(c-50,1771) -84,1771 -84,2551 cw(c16,2551) 16,2651 417,2651 cw(c417,2608) 460,2608 ccw(c527,2608) 527,2541 848,2541 cw(c848,2469) 920,2469 920,2284 cw(c875,2284) 875,2239 v3(860,2239)
  Bottom Layer w13: v3(860,2239) ccw(c860,2172) 793,2172 793,2016.31 ccw(c820.31,2016.31) 820.31,1989 899,1989 ccw(c899,2013) v3(923,2013) 968.54,2013 cw(c968.54,2010) C6.2
A4: R16.2 U2.14 | length 286.6
  Top Layer w9: U2.14 725.87,2091.87 cw(c740,2091.87) 740,2106 955.54,2106 cw(c955.54,2090) R16.2
A5: R9.2 R10.1 U2.15 | length 414.1
  Top Layer w9: U2.15 710.12,2097.76 cw(c788.24,2097.76) 733,2153 cw(c774.04,2111.96) 774.04,2170 R10.1
  Top Layer w15: v3(971.54,2133) R10.1
  Bottom Layer w15: R9.2 v3(971.54,2133)
A6: R10.2 R17.1 U2.16 | length 757.5
  Top Layer w9: U2.16 694.37,2112.02 cw(c757.98,2112.02) 713,2157 753.71,2197.71 cw(c785.79,2165.63) 785.79,2211 997.46,2211 cw(c997.46,2170) R10.2
  Top Layer w15: R17.1 1082.3,2010 ccw(c1082.3,2048.7) 1121,2048.7 1121,2137 ccw(c1088,2137) 1088,2170 R10.2
A7: R21.1 U2.17 | length 1257.7
  Top Layer w9: v3(678.62,2039.37) U2.17
  Top Layer w15: v4(929,2537) 929,2679.45 cw(c971.55,2679.45) 971.55,2722 1246,2722 1301.54,2666.46 R21.1@1301.54,2638.94
  Bottom Layer w15: v3(678.62,2039.37) 678.62,2097.2 cw(c778.62,2097.2) 707.91,2167.91 777.71,2237.71 cw(c846.01,2169.41) 846.01,2266 869,2266 ccw(c869,2326) 929,2326 v4(929,2537)
A9: R18.2 R19.2 U2.29 | length 1149.6
  Top Layer w9: v3(444,1965) cw(c464.82,1944.18) 464.82,1973.62 U2.29
  Top Layer w20: R19.2 v2(343.46,1060) R18.2
  Bottom Layer w15: v2@339.29,1064.18 cw(c410,1134.89) 310,1134.89 310,1543.58 cw(c410,1543.58) 339.29,1614.29 374.71,1649.71 ccw(c304,1720.42) 404,1720.42 404,1940.62 cw(c428.38,1940.62) 428.38,1965 v3(444,1965)
  Bottom Layer w20: v2@339.29,1064.18 v2(343.46,1060)
A10: R29.1 R30.1 U2.30 | length 850.5
  Top Layer w9: v3(432,1930) cw(c499.29,1862.71) 499.29,1957.87 U2.30
  Top Layer w20: R30.1 v2(343.46,1300) R29.1
  Bottom Layer w15: v2(343.46,1300) 343.46,1535.11 cw(c440.89,1535.11) 372,1604 402.71,1634.71 ccw(c332,1705.42) 432,1705.42 v3(432,1930)
A11: R42.1 U2.31 | length 231.5
  Top Layer w9: R42.1 ccw(c343.46,1913.55) 399.01,1858.01 463,1922 cw(c511.59,1873.41) 511.59,1942.13 U2.31
A12: R31.2 U2.32 | length 700.3
  Top Layer w9: v3(488,1914) cw(c517.88,1884.12) 517.88,1926.38 U2.32
  Top Layer w15: R31.2 v6(402,1420)
  Bottom Layer w15: v6(402,1420) 457,1420 ccw(c457,1471) 508,1471 508,1894 ccw(c488,1894) v3(488,1914)
B0: R32.2 R34.2 U2.18 | length 368.7
  Top Layer w9: U2.18 662.87,2114.48 cw(c714.52,2114.48) 678,2151 766.91,2239.91 cw(c813,2193.82) 813,2259 ccw(c813,2306) 860,2306 R32.2
  Bottom Layer w9: R34.2 v2(860,2337)
B1: R24.2 R25.1 U2.19 | length 342.5
  Top Layer w9: U2.19 647.13,2112.78 cw(c725.22,2112.78) 670,2168 756.29,2254.29 ccw(c699.04,2311.54) R24.2 v2(780,2337)
  Bottom Layer w9: R25.1 v2(780,2337)
B2: R25.2 U2.20 | length 433.6
  Top Layer w9: v3(631.38,2039.37) U2.20
  Bottom Layer w9: v3(631.38,2039.37) ccw(c567.11,2103.64) 658,2103.64 658,2151.58 cw(c729.03,2151.58) 678.8,2201.8 715.74,2238.74 ccw(c652.47,2302) 741.94,2302 741.94,2361.59 cw(c758.82,2361.59) 758.82,2378.46 R25.2
B10: R27.2 U2.21 | length 374.3
  Top Layer w9: U2.21 615.63,2105.14 cw(c657.86,2105.14) v3(628,2135)
  Bottom Layer w15: v3(628,2135) 628,2351.88 cw(c654.58,2351.88) 654.58,2378.46 R27.2
B11: R26.2 R27.1 U2.22 | length 327.2
  Top Layer w9: U2.22 599.88,2114.46 cw(c699.88,2114.46) 629.17,2185.17 670.71,2226.71 ccw(c600,2297.42) 700,2297.42 R26.2 v2(700,2337)
  Bottom Layer w9: R27.1 v2(700,2337)
B12: R33.2 R35.2 U2.25 | length 285
  Top Layer w10: R35.2 457.08,2075 cw(c457.08,1975) 527.79,2045.71 U2.25
  Top Layer w20: R35.2 R33.2
B13: EN1.2 U2.26 | length 1005.2
  Top Layer w9: EN1.2 61.54,2548.37 ccw(c80.91,2548.37) 80.91,2529 142.05,2529 cw(c142.05,2501.05) 170,2501.05 170,2060 ccw(c195,2060) 195,2035 437,2035 451.13,2020.87 U2.26
B14: R40.1 U2.27 | length 196.1
  Top Layer w9: R40.1 cw(c367.89,1970.57) 367.89,2005.12 U2.27
B15: C5.2 R5.2 R11.2 U2.28 | length 334.6
  Top Layer w9: R5.2 ccw(c343.46,1942.85) 363.16,1923.16 406,1966 cw(c462.42,1909.58) 462.42,1989.37 U2.28
  Top Layer w20: R5.2 v3(343.46,1950)
  Bottom Layer w20: C5.2 v3(343.46,1950) R11.2
C14: ERR1.2 U2.4 | length 1492.5
  Top Layer w9: U2.4 823.21,1910.63 ccw(c823.21,1935.79) v3(841,1918) ; ERR1.2 882,2710 cw(c882,2688) 904,2688 v3(904,2630)
  Bottom Layer w9: v3(841,1918) 841.71,1917.29 ccw(c912.42,1988) 912.42,1888 1087,1888 ccw(c1087,1937) 1136,1937 1136,2596.05 ccw(c1102.05,2596.05) 1102.05,2630 v3(904,2630)
C15: RUN1.2 U2.5 | length 1328.9
  Top Layer w9: U2.5 800.77,1926.38 ccw(c800.77,1959.23) v3(824,1936) ; RUN1.2 793.46,2619.14 cw(c803.33,2619.14) 803.33,2629 v3(874,2629)
  Bottom Layer w9: v3(824,1936) 828.71,1940.71 cw(c899.42,1870) 899.42,1970 1059.86,1970 ccw(c1059.86,2004.14) 1083.98,1979.98 1107,2003 ccw(c1075.62,2034.38) 1120,2034.38 1120,2581.69 ccw(c1092.69,2581.69) 1092.69,2609 894,2609 cw(c894,2629) v3(874,2629)
D2: R20.2 U2.34 | length 871.9
  Top Layer w9: v3(472,1885) cw(c495.86,1861.14) 495.86,1894.88 U2.34
  Top Layer w15: R20.2 v6(402,1180)
  Bottom Layer w15: v6(402,1180) 402,1325.96 ccw(c343.96,1325.96) 385,1367 cw(c416.38,1398.38) 372,1398.38 372,1507.58 cw(c472,1507.58) 401.29,1578.29 442.71,1619.71 ccw(c372,1690.42) 472,1690.42 v3(472,1885)
D3: R41.2 U2.35 | length 239.6
  Top Layer w9: R41.2 ccw(c343.46,1828.72) 395.59,1776.59 484,1865 cw(c518.12,1830.88) 518.12,1879.13 U2.35
GND: C1.2 C2.2 C3.2 C4.2 C5.1 C6.1 C7.1 C8.1 C9.1 C10.1 C14.1 C15.2 C16.1 C17.1 C18.1 C19.1 D1.A D2.A D3.A DCIN.2 ENABLE1.1 Hall.1 POW1.2 R6.2 R9.1 R11.1 R18.1 R29.2 R37.2 R39.2 R58.1 R62.1 SIGIN.3 SIGIN.4 SW.3 SW.5 U1.6 U2.0 U2.1 U2.24 | length 3106.3
  Top Layer w9: U2.24 568.39,2036.61 ccw(c655,2036.61) U2.0 ; U2.1 793.61,1863.39 cw(c793.61,1848) 809,1848 v2(809,1833)
  Top Layer w20: POW1.2 v2(61.54,2766) ; v2(212,1100) R18.1 ; v2(212,1340) R29.2 ; v2(351,873.46) C1.2 418,1005.02 cw(c469.98,1005.02) 469.98,1057 800.34,1057 cw(c800.34,997.34) 860,997.34 860,801.47 cw(c827.35,801.47) 827.35,768.82 U1.6 ; v2(456,1551.54) C14.1 ; R39.2 360.69,2311.54 cw(c360.69,2336.22) 336,2336.22 v2(336,2337.79) v2(336,2402.89) 336,2408 cw(c365,2408) 365,2437 561.46,2437 cw(c561.46,2378.46) C18.1 ; R6.2 v2(631.46,953) ; C7.1 C8.1 ; C9.1 C10.1 ; v2(1602,2663) 1602,2785 Hall.1
  Bottom Layer w20: ENABLE1.1 124.36,2183.98 cw(c124.36,2145.33) 163,2145.33 163,2032.78 ccw(c200.78,2032.78) 200.78,1995 R11.1 C5.1 ; v2(744,2477) 744,2516 cw(c763,2516) 763,2535 R37.2 ; C19.1 v2(1085,1930) ; C6.1 1038.46,2050 ; R9.1 1038.46,2050 ; v2(1083,2050) 1038.46,2050
  other v2: 1061,1718 1041,1812
  other v6: 1161.54,2358 1161.54,2582.5
  other v7: 624,1907 686,1907 686,1963 625,1964
HOA: R43.1 U2.47 | length 1330.2
  Top Layer w9: U2.47 v3(725.87,1860.63)
  Top Layer w20: v4(1100,971) R43.1
  Bottom Layer w20: v3(725.87,1860.63) 1035.12,1860.63 cw(c1035.12,1795.75) 1100,1795.75 v4(1100,971)
HOB: R44.1 U2.43 | length 2145.6
  Top Layer w9: U2.43 v3(662.87,1860.63)
  Top Layer w20: v4(1700,893) ccw(c1700,928) 1735,928 R44.1
  Bottom Layer w20: v3(662.87,1860.63) 662.87,1802.13 ccw(c697,1802.13) 697,1768 924.92,1768 cw(c924.92,1715.92) 977,1715.92 977,926.49 ccw(c1010.49,926.49) 1010.49,893 v4(1700,893)
HOC: R45.1 U2.39 | length 3144.5
  Top Layer w9: U2.39 v3(599.88,1860.63)
  Top Layer w20: v4(2365,866) R45.1
  Bottom Layer w20: v3(599.88,1860.63) 599.88,1733.2 ccw(c629.08,1733.2) 629.08,1704 754.75,1704 cw(c754.75,1659.75) 799,1659.75 799,780.12 ccw(c838.12,780.12) 838.12,741 2323.51,741 ccw(c2323.51,782.49) 2365,782.49 v4(2365,866) ccw(c2365,865) v4@2364,865
IA: Q7.3 Q8.3 R32.1 R52.1 R55.2 R60.2 | length 1879.2
  Top Layer w20: v4(678,2507) 822.72,2507 cw(c822.72,2469.72) 860,2469.72 R32.1
  Bottom Layer w20: v4(678,2507) 678,2623 cw(c714,2623) 714,2659 1145,2659 cw(c1145,2612) 1192,2612 1192,1825.89 ccw(c1292,1825.89) 1221.29,1755.18 R60.2
IB: Q9.3 Q10.3 R33.1 R53.1 R56.2 R61.2 | length 3359.2
  Top Layer w20: R33.1 276.54,2453.54 cw(c313,2453.54) 313,2490 594,2490 653,2431 v4(678,2431) ; v4(1274,1922) 1836.46,1922 cw(c1836.46,1872.99) 1885.47,1872.99 R61.2
  Bottom Layer w20: v4(678,2431) 648.97,2431 cw(c648.97,2467.97) 612,2467.97 612,2665.68 cw(c668.32,2665.68) 668.32,2722 1270.51,2722 cw(c1270.51,2675.51) 1317,2675.51 1317,1965 cw(c1274,1965) v4(1274,1922)
ISUM: Q11.3 Q12.3 R16.1 R24.1 R26.1 R54.1 R55.1 R56.1 R58.2 R60.1 R61.1 R62.2 | length 2653.9
  Top Layer w20: v4(678,2468) 695,2468 cw(c695,2448) 715,2448 715,2382.46 cw(c711,2382.46) 711,2378.46 R24.1 ; R16.1 v4(1091,2090) ; R60.1@1222.77,2090 ccw(c1222.77,2118.7) R60.1
  Bottom Layer w20: v4(1091,2090) 1091,2524 ccw(c1032,2524) 1032,2583 741.49,2583 ccw(c741.49,2554.51) 713,2554.51 713,2487 cw(c694,2487) 694,2468 v4(678,2468) 664.8,2468 cw(c664.8,2491.8) 641,2491.8 641,2639 cw(c693,2639) 693,2691 1208.29,2691 cw(c1208.29,2647.82) 1251.47,2647.82 R60.1
LOA: R49.1 U2.45 | length 826
  Top Layer w9: U2.45 v3(694.37,1860.63)
  Top Layer w20: v4(1033,1436.54) R49.1
  Bottom Layer w20: v3(694.37,1860.63) 694.37,1826.97 ccw(c719.34,1826.97) 719.34,1802 982.22,1802 cw(c982.22,1751.22) 1033,1751.22 v4(1033,1436.54)
LOB: R50.1 U2.41 | length 2781.7
  Top Layer w9: U2.41 v3(631.38,1860.63)
  Top Layer w20: R50.1 1735,1239.95 ccw(c1762.95,1239.95) 1762.95,1212 v4(1787,1212)
  Bottom Layer w20: v3(631.38,1860.63) 631.38,1771.62 ccw(c668,1771.62) 668,1735 906.3,1735 cw(c906.3,1699.3) 942,1699.3 942,876.12 ccw(c981.12,876.12) 981.12,837 1745.03,837 ccw(c1745.03,878.97) 1787,878.97 v4(1787,1212)
LOC: R51.1 U2.37 | length 3708.1
  Top Layer w9: v3(559,1781) ccw(c536.34,1803.66) 568.39,1803.66 U2.37
  Top Layer w20: R51.1 2365,1229.07 ccw(c2399.07,1229.07) 2399.07,1195 v4(2432,1195)
  Bottom Layer w20: v3(559,1781) 559,1708.49 ccw(c596.49,1708.49) 596.49,1671 733.73,1671 cw(c733.73,1645.73) 759,1645.73 759,749.17 ccw(c802.17,749.17) 802.17,706 2360.44,706 ccw(c2360.44,777.56) 2432,777.56 v4(2432,1195)
NetC10_2: C10.2 Hall.5 R15.1 R21.2 | length 617
  Top Layer w20: R15.1 1088.46,2675.46 cw(c1105,2675.46) 1105,2692 1203.88,2692 cw(c1203.88,2667.42) 1228.46,2667.86 ; C10.2@1228.46,2636.04 cw(c1171.46,2635) C10.2 ; 1228.46,2667.42 C10.2 ; Hall.5 1366.42,2637.05 ccw(c1368.46,2637.05) R21.2 1368.46,2598.69 cw(c1352.77,2598.69) 1352.77,2583 1247.97,2583 cw(c1247.97,2602.5) 1228.46,2602.5 C10.2
NetC11_1: C11.1 U2.48 | length 217
  Top Layer w10: U2.48 741.61,1650.78 ccw(c787.32,1650.78) C11.1
NetC12_1: C12.1 U2.44 | length 218.3
  Top Layer w10: C12.1 ccw(c670,1627.09) 678.62,1627.09 U2.44
NetC13_1: C13.1 U2.40 | length 221.6
  Top Layer w10: C13.1 585,1672.37 cw(c639.63,1672.37) 601,1711 ccw(c565.68,1746.32) 615.63,1746.32 U2.40
NetD4_A: D4.A SW.1
NetEN1_1: EN1.1 R8.2 | length 103.1
  Top Layer w20: EN1.1 R8.2
NetENABLE1_2: ENABLE1.2 R40.2 R42.2 | length 500.1
  Top Layer w50: ENABLE1.2 155.77,1995 ; R42.2 209.58,1835 cw(c209.58,1889.58) 155,1889.58 155,1994.23 cw(c155.77,1994.23) 155.77,1995 ; R40.2 155.77,1995
NetERR1_1: ERR1.1 R2.2 | length 103.1
  Top Layer w20: R2.2 ERR1.1
NetHall_2: Hall.2 R28.2 | length 636.6
  Top Layer w20: R28.2 1500.44,2305 ccw(c1500.44,2348.14) 1543.58,2348.14 Hall.2
NetHall_3: Hall.3 R23.2 | length 471.7
  Top Layer w20: R23.2 1441.79,2411 ccw(c1441.79,2453.74) 1484.53,2453.74 Hall.3
NetHall_4: Hall.4 R22.2 | length 297.8
  Top Layer w20: R22.2 1392.47,2530 ccw(c1392.47,2563) 1425.47,2563 Hall.4
NetPOW1_1: POW1.1 R1.2 | length 103.1
  Top Layer w20: POW1.1 R1.2
NetQ1_2: Q1.2 Q2.2 R43.2 R46.2 | length 528.7
  Top Layer w15: R46.2 cw(c1186.54,1086.54) 1205,1086.54 Q1.2 1205,905 ccw(c1230,905) 1230,880 1444.05,880 ccw(c1444.05,907.95) 1472,907.95 Q2.2
NetQ3_2: Q3.2 Q4.2 R44.2 R47.2 | length 527.3
  Top Layer w15: R47.2 cw(c1821.54,1087.54) 1839,1087.54 Q3.2 1839,906.95 ccw(c1865.95,906.95) 1865.95,880 2078.05,880 ccw(c2078.05,907.95) 2106,907.95 Q4.2
NetQ5_2: Q5.2 Q6.2 R45.2 R48.2 | length 525.9
  Top Layer w15: R48.2 cw(c2456.54,1088.54) 2473,1088.54 Q5.2 2473,908.83 ccw(c2501.83,908.83) 2501.83,880 2712.05,880 ccw(c2712.05,907.95) 2740,907.95 Q6.2
NetQ7_2: Q7.2 Q8.2 R49.2 R52.2 | length 342
  Top Layer w15: Q7.2 1205,1480 ccw(c1230,1480) 1230,1455 1444.05,1455 ccw(c1444.05,1482.95) 1472,1482.95 Q8.2
NetQ9_2: Q9.2 Q10.2 R50.2 R53.2 | length 342
  Top Layer w15: Q9.2 1839,1480 ccw(c1864,1480) 1864,1455 2078.05,1455 ccw(c2078.05,1482.95) 2106,1482.95 Q10.2
NetQ11_2: Q11.2 Q12.2 R51.2 R54.2 | length 342
  Top Layer w15: Q11.2 2473,1480 ccw(c2498,1480) 2498,1455 2712.05,1455 ccw(c2712.05,1482.95) 2740,1482.95 Q12.2
NetR3_1: R3.1 U1.2 | length 686.8
  Top Layer w20: R3.1 530.38,745 cw(c530.38,769.38) 506,769.38 506,967.98 cw(c557.02,967.98) 557.02,1019 720.69,1019 cw(c720.69,976.69) 763,976.69 U1.2
NetR4_1: R4.1 R6.1 U1.1 | length 569.7
  Top Layer w20: R4.1 R6.1 564.54,958.54 cw(c592,958.54) 592,986 657.17,986 cw(c657.17,955.17) 688,955.17 688,843 ccw(c711,843) 711,820 778.33,820 ccw(c778.33,842.07) 800.4,842.07 U1.1
NetR7_2: R7.2 RUN1.1 | length 103.1
  Top Layer w20: R7.2 RUN1.1
NetR19_1: R19.1 SIGIN.1 | length 303.1
  Top Layer w15: SIGIN.1 60,1051.31 ccw(c91.31,1051.31) 91.31,1020 R19.1
NetR20_1: R20.1 SIGIN.2 | length 363.3
  Top Layer w15: SIGIN.2 -40,1149.06 cw(c-18.06,1149.06) -18.06,1171 267.54,1171 ccw(c267.54,1180) R20.1
NetR30_2: R30.2 SIGIN.5 | length 237.1
  Top Layer w15: SIGIN.5 90.71,1289.29 ccw(c161.42,1360) 161.42,1260 R30.2
NetR31_1: R31.1 SIGIN.6 | length 391.3
  Top Layer w15: SIGIN.6 -40,1361.17 cw(c18.83,1361.17) 18.83,1420 R31.1
NetR34_1: R34.1 R36.2 R37.1 | length 157.4
  Bottom Layer w20: R37.1 858.46,2380 ccw(c860,2380) R34.1
NetR35_1: R35.1 R38.2 R39.1 | length 654.8
  Top Layer w15: v4(222,2075) R35.1
  Top Layer w20: v4(399,2378.46) R39.1 R38.2
  Bottom Layer w15: v4(222,2075) 349.6,2075 ccw(c349.6,2124.4) 399,2124.4 v4(399,2378.46)
RST: C19.2 R59.1 SW.10 U2.8 | length 2686.5
  Top Layer w9: U2.8 837.63,1973.62 cw(c837.63,1906.63) 885,1954 ccw(c942.94,2011.94) 942.94,1930 R59.1 971.54,1919.46 ccw(c1000,1919.46) 1000,1891 1108,1891 ccw(c1108,1949) 1166,1949 1166,2169 cw(c1204,2169) 1204,2207 1549,2207 ccw(c1549,2307) 1649,2307 1649,2847 ccw(c1627,2847) 1627,2869 1056.42,2869 cw(c1056.42,2969) 985.71,2898.29 948.29,2935.71 ccw(c877.58,2865) 877.58,2965 SW.10
  Bottom Layer w9: v3(923,1930) C19.2
RX: SW.9 U2.7 | length 1287.8
  Top Layer w9: v3(743,1965) ccw(c760.2,1982.2) 760.2,1957.87 U2.7
  Bottom Layer w12: v3(743,1965) 743,1990.52 ccw(c719.52,1990.52) 719.52,2014 615.83,2014 cw(c615.83,2042.83) 587,2042.83 587,2718.51 cw(c623.49,2718.51) 623.49,2755 803.51,2755 ccw(c803.51,2792.49) 841,2792.49 SW.9
SWCLK: SW.4 U2.36 | length 1225.6
  Top Layer w9: U2.36 v3(565.63,1863.39)
  Bottom Layer w15: SW.4 568.83,2965 cw(c568.83,2942.83) 591,2942.83 591,2864.42 cw(c491,2864.42) 561.71,2793.71 552.29,2784.29 ccw(c623,2713.58) 523,2713.58 523,2049.6 ccw(c623,2049.6) 552.29,1978.89 592,1939.18 592,1889.76 v3(565.63,1863.39)
SWDIO: SW.2 U2.33 | length 1151.4
  Top Layer w9: U2.33 v3(565.63,1910.63)
  Bottom Layer w15: SW.2 470.51,2965 cw(c470.51,2941.51) 494,2941.51 494,2023.68 ccw(c594,2023.68) 523.29,1952.97 v3(565.63,1910.63)
TX: SW.7 U2.6 | length 1260.8
  Top Layer w9: v3(743,1935) cw(c760.2,1917.8) 760.2,1942.13 U2.6
  Bottom Layer w12: SW.7 741,2814.27 cw(c708.73,2814.27) 708.73,2782 613,2782 ccw(c613,2731) 562,2731 562,2025.42 ccw(c594.42,2025.42) 594.42,1993 705,1993 cw(c705,1976) 722,1976 722,1945 ccw(c732,1945) 732,1935 v3(743,1935)
VCC5V: C15.1 C16.2 C17.2 C18.2 D4.K ENABLE1.3 Hall.6 R1.1 R2.1 R7.1 R8.1 R12.2 R13.2 R14.2 R15.2 R36.1 R38.1 R59.2 U2.3 U2.9 U2.23 | length 2467.1
  Top Layer w9: 582,2309 cw(c582,2306.87) 584.13,2306.87 U2.23 ; U2.3 885.23,1894.88 cw(c885.23,1794.88) 955.94,1865.59 C17.2 ; U2.9 868.79,1989.37 cw(c868.79,1960.79) 889,1981 ccw(c915.56,2007.56) 915.56,1970 1018.9,1970 cw(c1018.9,1950.44) 1038.46,1950.44 R59.2@1038.46,1945.46
  Top Layer w15: R59.2 1038.46,1945.46 cw(c1058,1945.46) 1058,1965 v2(1108,1965)
  Top Layer w20: v2(1259,2785) Hall.6
  Top Layer w25: R13.2 994.41,2411 cw(c994.41,2441.41) 964,2441.41 964,2497 cw(c997,2497) 997,2530 R14.2 R15.2
  Top Layer w30: R8.1 v2(363,2590) ; D4.K 276.9,2983.9 249,2956 249,2814 297.32,2765.68 297.32,2711.14 R1.1 R2.1 R7.1 ; v2(451,2199) 510,2199 ccw(c510,2229) 540,2229 R38.1 ; v2(898,1675) C15.1 ; C16.2 C17.2 ; R12.2 R13.2
  Bottom Layer w20: v2(745,2440) 776.54,2440 ccw(c776.54,2455) R36.1
  other v2: 382,2710 421.5,2710 461,2710 249,2844 249,2886.5 249,2929
  other v4: 964,2467
VCC12V: C2.1 C3.1 C4.1 D1.K D2.K D3.K DCIN.1 Q1.1 Q2.1 Q3.1 Q4.1 Q5.1 Q6.1 R3.2 R4.2 U1.4 U1.5
VCC12VO: C1.1 C14.2 R5.1 U1.3 U2.2 | length 475.3
  Top Layer w9: U2.2 836.02,1879.13 cw(c836.02,1860.15) 855,1860.15 v2(855,1833)
  Top Layer w20: U1.3 v2(725.6,923)
  Top Layer w30: v4(227,1915) R5.1 ; v4(351,806.54) C1.1 ; v4(411,1509) 411,1592 cw(c437.46,1592) 437.46,1618.46 C14.2
VSA: C11.2 MOTOR.1 Q1.3 Q2.3 Q7.1 Q8.1 R46.1 U2.46 | length 1107.7
  Top Layer w10: U2.46 710.12,1573.97 ccw(c732.56,1573.97) 732.56,1551.54 C11.2
  Top Layer w30: C11.2 755,1300 ccw(c805,1300) 805,1250 1267,1250
  other v1: 1331,1005 1400,1005 1471,1005 1542,1005 1615,1005 1331,1073 1400,1073 1471,1073 1542,1073 1615,1073 1331,1141 1400,1141 1471,1141 1542,1141 1615,1141
  other v5: 1330,1210 1401,1210 1472,1210 1543,1210 1614,1210
VSB: C12.2 MOTOR.2 Q3.3 Q4.3 Q9.1 Q10.1 R47.1 U2.42 | length 2730.3
  Top Layer w10: U2.42 647.13,1709.27 cw(c605.73,1709.27) 635,1680 ccw(c651.9,1663.1) 628,1663.1 628,1566.35 ccw(c642.82,1566.35) 642.82,1551.54 C12.2
  Top Layer w30: C12.2 670,1242.2 ccw(c719.2,1242.2) 719.2,1193 v4(867,1193)
  Bottom Layer w30: v4(867,1193) 867,834 ccw(c918,834) 918,783 1781.09,783 ccw(c1781.09,836.91) 1835,836.91 1835,1177 cw(c1868,1177) 1868,1210 v5(1964,1210)
  other v1: 1965,1005 2034,1005 2105,1005 2176,1005 2249,1005 1965,1073 2034,1073 2105,1073 2176,1073 2249,1073 1965,1141 2034,1141 2105,1141 2176,1141 2249,1141
  other v5: 2035,1210 2106,1210 2177,1210 2248,1210
VSC: C13.2 MOTOR.3 Q5.3 Q6.3 Q11.1 Q12.1 R48.1 U2.38 | length 3663.9
  Top Layer w10: U2.38 584.13,1762.02 cw(c511.98,1762.02) 563,1711 ccw(c611.28,1662.72) 543,1662.72 543,1567.68 ccw(c559.15,1567.68) 559.15,1551.54 C13.2
  Top Layer w30: C13.2 585,1183.49 ccw(c631.49,1183.49) 631.49,1137 v4(688,1137)
  Bottom Layer w30: v4(688,1137) 688,737.74 ccw(c757.74,737.74) 757.74,668 2403.82,668 ccw(c2403.82,744.18) 2480,744.18 2480,1167 cw(c2523,1167) 2523,1210 v5(2598,1210)
  other v1: 2599,1005 2668,1005 2739,1005 2810,1005 2883,1005 2599,1073 2668,1073 2739,1073 2810,1073 2883,1073 2599,1141 2668,1141 2739,1141 2810,1141 2883,1141
  other v5: 2669,1210 2740,1210 2811,1210 2882,1210
pads on no net: Hall.0 SW.6 SW.8

## Polygon pours and split planes (outlines as drawn)
GND on GND (split plane): 2932.71,3004.24 2939.95,3003.16 2947.05,3001.38 2953.94,2998.92 2960.56,2995.79 2966.84,2992.02 2972.72,2987.66 2978.14,2982.75 2983.06,2977.32 2987.42,2971.44 2991.18,2965.16 2994.31,2958.55 2996.78,2951.65 2998.56,2944.55 2999.63,2937.31 2999.82,2933.52 2999.67,2932.04 2999.51,2930.39 2999.51,-30.39 2999.57,-30.98 2999.24,-37.71 2998.16,-44.95 2996.38,-52.05 2993.92,-58.94 2990.79,-65.56 2987.02,-71.84 2982.66,-77.72 2977.75,-83.14 2972.32,-88.06 2966.44,-92.42 2960.16,-96.18 2953.55,-99.31 2946.65,-101.78 2939.55,-103.56 2932.31,-104.63 2925.59,-104.96 2925,-104.9 -31.45,-104.9 -31.47,-104.9 -35.39,-104.51 -35.98,-104.57 -42.71,-104.24 -49.95,-103.16 -57.05,-101.38 -63.94,-98.92 -70.56,-95.79 -76.84,-92.02 -82.72,-87.66 -88.14,-82.75 -93.06,-77.32 -97.42,-71.44 -101.18,-65.16 -104.31,-58.55 -106.78,-51.65 -108.56,-44.55 -109.63,-37.31 -109.96,-30.59 -109.9,-30 -109.9,2930 -109.96,2930.59 -109.63,2937.31 -108.56,2944.55 -106.78,2951.65 -104.31,2958.55 -101.18,2965.16 -97.42,2971.44 -93.06,2977.32 -88.14,2982.75 -82.72,2987.66 -76.84,2992.02 -70.56,2995.79 -63.94,2998.92 -57.05,3001.38 -49.95,3003.16 -42.71,3004.24 -35.98,3004.57 -35.39,3004.51 2925.39,3004.51 2925.98,3004.57
VCC12VO on POWER (split plane): 899.57,2021.68 904.05,2020.78 908.38,2019.31 912.49,2017.29 916.29,2014.75 919.73,2011.73 922.75,2008.29 925.29,2004.49 927.31,2000.38 928.78,1996.05 929.68,1991.57 929.96,1987.29 929.93,1987 929.93,1804 929.96,1803.71 929.68,1799.43 928.78,1794.95 927.31,1790.62 925.29,1786.51 922.75,1782.71 919.73,1779.27 916.29,1776.25 912.49,1773.71 908.38,1771.69 904.05,1770.22 899.57,1769.32 895.29,1769.04 895,1769.07 859,1769.07 859,1769.08 852.62,1768.76 846.3,1767.83 840.11,1766.28 834.1,1764.12 828.32,1761.39 822.84,1758.11 817.71,1754.31 812.98,1750.02 808.69,1745.29 804.89,1740.16 801.61,1734.68 798.88,1728.9 796.72,1722.89 795.17,1716.7 794.24,1710.38 793.92,1704 793.93,1704 793.93,774 793.96,773.71 793.68,769.43 792.78,764.95 791.31,760.62 789.29,756.51 786.75,752.71 783.73,749.27 780.29,746.25 776.49,743.71 772.38,741.69 768.05,740.22 763.57,739.32 759.29,739.04 759,739.07 211,739.07 210.71,739.04 206.43,739.32 201.95,740.22 197.62,741.69 193.51,743.71 189.71,746.25 186.27,749.27 183.25,752.71 180.71,756.51 178.69,760.62 177.22,764.95 176.32,769.43 176.04,773.71 176.07,774 176.07,1987 176.04,1987.29 176.32,1991.57 177.22,1996.05 178.69,2000.38 180.71,2004.49 183.25,2008.29 186.27,2011.73 189.71,2014.75 193.51,2017.29 197.62,2019.31 201.95,2020.78 206.43,2021.68 210.71,2021.96 211,2021.93 895,2021.93 895.29,2021.96
VCC5V on POWER (split plane): 2932.71,3004.24 2939.95,3003.16 2947.05,3001.38 2953.94,2998.92 2960.56,2995.79 2966.84,2992.02 2972.72,2987.66 2978.14,2982.75 2983.06,2977.32 2987.42,2971.44 2991.18,2965.16 2994.31,2958.55 2996.78,2951.65 2998.56,2944.55 2999.63,2937.31 2999.82,2933.52 2999.67,2932.04 2999.51,2930.39 2999.51,-30.39 2999.57,-30.98 2999.24,-37.71 2998.16,-44.95 2996.38,-52.05 2993.92,-58.94 2990.79,-65.56 2987.02,-71.84 2982.66,-77.72 2977.75,-83.14 2972.32,-88.06 2966.44,-92.42 2960.16,-96.18 2953.55,-99.31 2946.65,-101.78 2939.55,-103.56 2932.31,-104.63 2925.59,-104.96 2925,-104.9 -31.45,-104.9 -31.47,-104.9 -35.39,-104.51 -35.98,-104.57 -42.71,-104.24 -49.95,-103.16 -57.05,-101.38 -63.94,-98.92 -70.56,-95.79 -76.84,-92.02 -82.72,-87.66 -88.14,-82.75 -93.06,-77.32 -97.42,-71.44 -101.18,-65.16 -104.31,-58.55 -106.78,-51.65 -108.56,-44.55 -109.63,-37.31 -109.96,-30.59 -109.9,-30 -109.9,2930 -109.96,2930.59 -109.63,2937.31 -108.56,2944.55 -106.78,2951.65 -104.31,2958.55 -101.18,2965.16 -97.42,2971.44 -93.06,2977.32 -88.14,2982.75 -82.72,2987.66 -76.84,2992.02 -70.56,2995.79 -63.94,2998.92 -57.05,3001.38 -49.95,3003.16 -42.71,3004.24 -35.98,3004.57 -35.39,3004.51 2925.39,3004.51 2925.98,3004.57

## Keep-outs
Keep-Out Layer:
  lines w10: -35.39,-124.61 cw(c-35.39,-30) -130,-30 -130,2930 cw(c-35.39,2930) -35.39,3024.61 2925.39,3024.61 cw(c2925.39,2930) 3020,2930 ; -35,-125 2925,-125 ccw(c2925,-30.39) 3019.61,-30.39 3019.61,2930.39

## Other copper
Top Layer:
  region net VCC5V: 920,1656 ccw(c926,1656) 926,1650 973,1650 ccw(c973,1671) 994,1671 994,1764 ccw(c990,1764) 990,1768 947,1768 947,1728 cw(c920,1728) 920,1701
  region net GND: 1016,1874 1052,1874 cw(c1052,1861) 1065,1861 1072,1726 ccw(c1092,1722) 1088,1702 cw(c1088,1697) 1093,1697 1093,1655 cw(c1084,1655) 1084,1646 1031,1646 cw(c1031,1651) 1026,1651 cw(c1026,1664) 1013,1664 1013,1872 cw(c1016,1872) 1016,1875
  region net NetD4_A: 300.94,2823 459.94,2823 ccw(c459.94,2849) 485.94,2849 485.94,2887 ccw(c472.94,2887) 472.94,2900 427.06,2900 ccw(c427.06,2824.89) 373.94,2878 cw(c354.63,2897.31) 354.63,2870 302.94,2870 ccw(c302.94,2859) 291.94,2859 291.94,2833 ccw(c301.44,2832.5)
  region net VCC5V: 512,2284 642,2284 ccw(c642,2294) 652,2294 652,2333 ccw(c646,2333) 646,2339 515,2339 ccw(c515,2334) 510,2334 510,2286 ccw(c512,2286)
  region net GND: 0,455 283.58,455 cw(c283.58,355) 354.29,425.71 600.71,179.29 ccw(c671.42,250) 671.42,150 1540,150 cw(c1540,110) 1580,110 1580,5 cw(c1560,5) 1560,-15 591.42,-15 cw(c591.42,85) 520.71,14.29 264.29,270.71 ccw(c193.58,200) 193.58,300 10,300 cw(c10,330) -20,330 -20,435 cw(c0,435)
  region net GND: 2480,2075 2565,2075 cw(c2565,2010) 2630,2010 ccw(c2650,2010) 2650,1990 2755,1990 ccw(c2755,2010) 2775,2010 2775,2125 ccw(c2730,2125) 2730,2170 2485,2170 ccw(c2485,2165) 2480,2165
  region net ISUM: 1213,1995 2178.58,1995 cw(c2178.58,1895) 2249.29,1965.71 2507.5,1707.5 ccw(c2455.66,1727.45) 2506.42,1750 2705,1750 2324.29,2130.71 ccw(c2253.58,2060) 2253.58,2160 1220,2160 ccw(c1220,2135) 1213,2159
  region net VSA: 1200,1440 1640,1440 1640,920 cw(c1625,920) 1625,905 1510,905 cw(c1510,915) 1500,915 1500,965 ccw(c1485,965) 1485,980 1385,980 ccw(c1385,970) 1375,970 1375,915 cw(c1360,915) 1360,900 1250,900 cw(c1250,915) 1235,915 1235,1225 ccw(c1200,1225) 1200,1260
  region net NetQ1_2: 1070,1075 1194.46,1075 ccw(c1194.46,1088.54) 1208,1088.54 1208,1122 ccw(c1200,1122) 1200,1130 1075,1130 ccw(c1075,1125) 1070,1125
  region net NetQ3_2: 1705,1075 1829.46,1075 ccw(c1829.46,1088.54) 1843,1088.54 1843,1122 ccw(c1835,1122) 1835,1130 1710,1130 ccw(c1710,1125) 1705,1125
  region net NetQ5_2: 2335,1075 2459.46,1075 ccw(c2459.46,1088.54) 2473,1088.54 2473,1122 ccw(c2465,1122) 2465,1130 2340,1130 ccw(c2340,1125) 2335,1125
  region net VCC12V: 603,855 603,620 ccw(c613,620) 613,610 763,610 ccw(c763,625) 778,625 778,780 ccw(c763,780) 763,795 683,795 cw(c683,815) 663,815 663,845 ccw(c653,845) 653,855
  region net VCC12V: -5,500 368.58,500 cw(c368.58,400) 439.29,470.71 610.71,299.29 ccw(c681.42,370) 681.42,270 1651.72,270 cw(c1651.72,201.72) 1700,250 ccw(c1736.21,286.21) 1736.21,235 2808.58,235 ccw(c2808.58,335) 2879.29,264.29 2915,300 ccw(c2878.79,336.21) 2930,336.21 2930,775 1226.42,775 ccw(c1226.42,675) 1155.71,745.71 1095,685 cw(c1058.79,721.21) 1058.79,670 35,670 ccw(c35,630) -5,630
  region net NetQ11_2: 2335,1480 2475,1480 ccw(c2475,1485) 2480,1485 2480,1620 ccw(c2465,1620) 2465,1635 2430,1635 ccw(c2430,1620) 2415,1620 2415,1560 cw(c2390,1560) 2390,1535 2345,1535 ccw(c2345,1525) 2335,1525
  region net NetQ9_2: 1705,1480 1845,1480 ccw(c1845,1485) 1850,1485 1850,1620 ccw(c1835,1620) 1835,1635 1800,1635 ccw(c1800,1620) 1785,1620 1785,1560 cw(c1760,1560) 1760,1535 1715,1535 ccw(c1715,1525) 1705,1525
  region net NetQ7_2: 1070,1480 1210,1480 ccw(c1210,1485) 1215,1485 1215,1620 ccw(c1200,1620) 1200,1635 1165,1635 ccw(c1165,1620) 1150,1620 1150,1560 cw(c1125,1560) 1125,1535 1080,1535 ccw(c1080,1525) 1070,1525
  region net VSC: 2468,1440 2908,1440 2908,920 cw(c2893,920) 2893,905 2778,905 cw(c2778,915) 2768,915 2768,965 ccw(c2753,965) 2753,980 2653,980 ccw(c2653,970) 2643,970 2643,915 cw(c2628,915) 2628,900 2518,900 cw(c2518,915) 2503,915 2503,1225 ccw(c2468,1225) 2468,1260
  region net VSB: 1834,1440 2274,1440 2274,920 cw(c2259,920) 2259,905 2144,905 cw(c2144,915) 2134,915 2134,965 ccw(c2119,965) 2119,980 2019,980 ccw(c2019,970) 2009,970 2009,915 cw(c1994,915) 1994,900 1884,900 cw(c1884,915) 1869,915 1869,1225 ccw(c1834,1225) 1834,1260
  region net ISUM: 2502.46,1850 2877.46,1850 cw(c2877.46,1815) 2912.46,1815 2912.46,1490 cw(c2892.46,1490) 2892.46,1470 2777.46,1470 cw(c2777.46,1480) 2767.46,1480 2767.46,1545 ccw(c2757.46,1545) 2757.46,1555 2657.46,1555 ccw(c2657.46,1540) 2642.46,1540 2642.46,1480 cw(c2632.46,1480) 2632.46,1470 2512.46,1470 cw(c2512.46,1485) 2497.46,1485 2497.46,1845 cw(c2502.46,1845)
  region net IB: 1862.46,1850 2242.47,1850 cw(c2242.47,1815) 2277.46,1815 2277.46,1490 cw(c2257.46,1490) 2257.46,1470 2142.46,1470 cw(c2142.46,1480) 2132.46,1480 2132.46,1545 ccw(c2122.46,1545) 2122.46,1555 2022.46,1555 ccw(c2022.46,1540) 2007.46,1540 2007.46,1480 cw(c1997.46,1480) 1997.46,1470 1877.46,1470 cw(c1877.46,1485) 1862.46,1485
  region net IA: 1230,1850 1610,1850 cw(c1610,1815) 1645,1815 1645,1490 cw(c1625,1490) 1625,1470 1510,1470 cw(c1510,1480) 1500,1480 1500,1545 ccw(c1490,1545) 1490,1555 1390,1555 ccw(c1390,1540) 1375,1540 1375,1480 cw(c1365,1480) 1365,1470 1245,1470 cw(c1245,1485) 1230,1485
  region: 1205,2005
  region: 1210,1990
  region: 1235,1480
Bottom Layer:
  region net VSA: 2025,2960 cw(c2025,2920) 2065,2920 2065,2591.42 cw(c1965,2591.42) 2035.71,2520.71 1774.29,2259.29 ccw(c1845,2188.58) 1745,2188.58 1745,1010 cw(c1685,1010) 1685,950 1290,950 cw(c1290,1005) 1235,1005 1235,1508.58 cw(c1335,1508.58) 1264.29,1579.29 1380,1695 1380,2288.58 cw(c1480,2288.58) 1409.29,2359.29 1820.71,2770.71 ccw(c1750,2841.42) 1850,2841.42 1850,2920 cw(c1890,2920) 1890,2960
  region net VSB: 2255,2960 cw(c2255,2935) 2280,2935 2280,2506.42 ccw(c2380,2506.42) 2309.29,2435.71 2360.71,2384.29 cw(c2290,2313.58) 2390,2313.58 2390,1020 cw(c2315,1020) 2315,945 1920,945 cw(c1920,1000) 1865,1000 1865,1478.58 cw(c1965,1478.58) 1894.29,1549.29 1970,1625 1970,2313.58 cw(c2117.98,2308.71) 2016.79,2416.79 2085,2475 2085,2920 cw(c2125,2920) 2125,2960
  region net VSC: 2305,2960 2305,2551.42 ccw(c2405,2551.42) 2334.29,2480.71 2610,2205 2610,1426.42 cw(c2510,1426.42) 2580.71,1355.71 2509,1284 2509,969.58 ccw(c2580,1040) 2580,940 2955,940 ccw(c2955,990) 3005,990 3005,2218.58 ccw(c2905,2218.58) 2975.71,2289.29 2529.29,2735.71 cw(c2600,2806.42) 2500,2806.42 2500,2930 ccw(c2470,2930) 2470,2960
  region: 2095,2960
  region: 1910,975
  text "成都航院" at 1176,384 h200
  text "逮虾户" at 1174,203.23 h200
  text "2022" at 1169,51 h200
POWER (plane layer: these items are gaps in the copper):
  lines w30: 161,774 ccw(c211,774) 211,724 259,724 759,724 ccw(c759,774) 809,774 809,1704 cw(c859,1704) 859,1754 895,1754 ccw(c895,1804) 945,1804 945,1987 ccw(c895,1987) 895,2037 211,2037 ccw(c211,1987) 161,1987 161,774

## Silkscreen, mask and mechanical layers (free items; w line width, h text height)
Top Overlay:
  lines w10: 6,1621 32,1647 ; 32,1520 32,1647 ; 58,1621 32,1647
  text "开" at 3,1665 h70
  text "关" at 1,1453 h70
  text "SPDOUT" at -92,1394 h30
  text "PWM" at 124,1394 h30
  text "DIROUT" at -87,1015 h30
  text "DIR" at 124,1015 h30
Bottom Overlay:
  text "B" at 2196.45,2650.68 h100
  text "C" at 2419.06,2649.01 h100
  text "A" at 2014.06,2647.99 h100
Bottom Solder:
  text "成都航院" at 1176,384 h200
  text "逮虾户" at 1174,203.23 h200
  text "2022" at 1169,51 h200